# Altium PCB ALLPRINT-CAPBOARD-677512.PcbDoc (part 1 of 3)
Units mm, origin at the board's own origin, x right, y up, seen from the top; angles counter-clockwise.
Board outline 105 x 100 mm, 4 copper layers (Top Layer, Layer 1, Layer 2, Bottom Layer), stack 1.586 mm thick; 295 components, 219 nets, 882 pads, 764 vias.
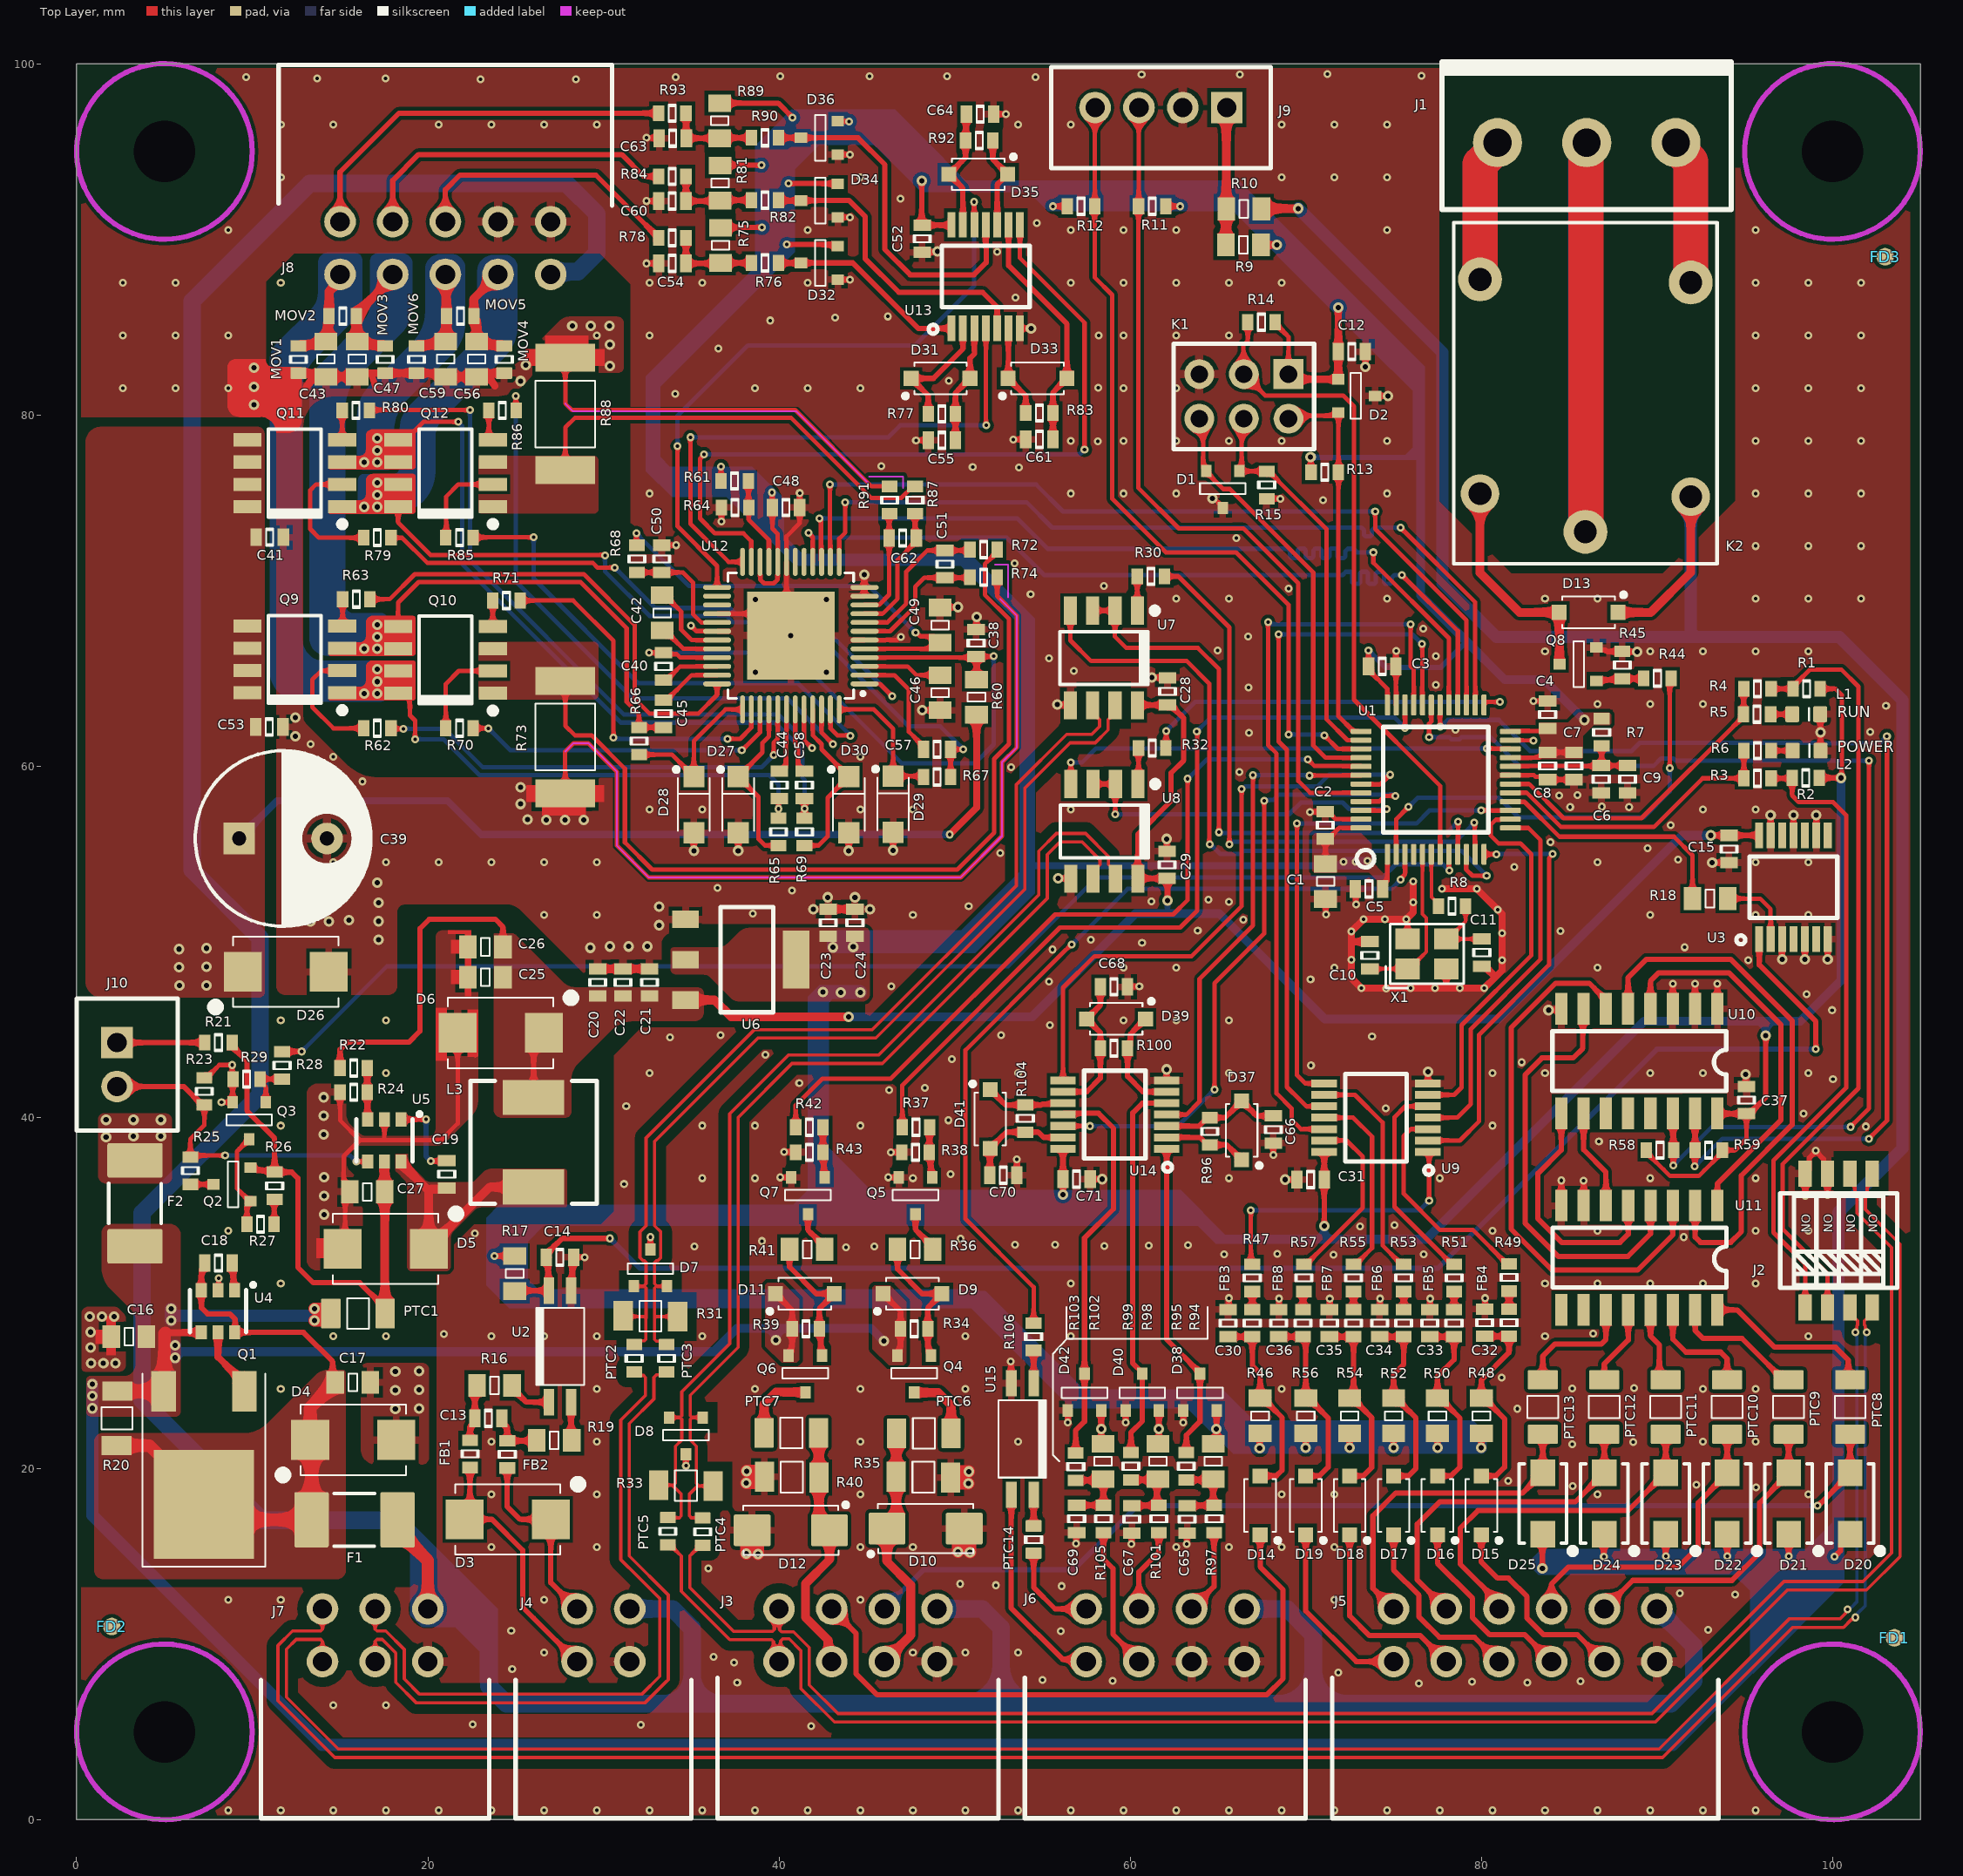
[diagram p0: Top Layer view]
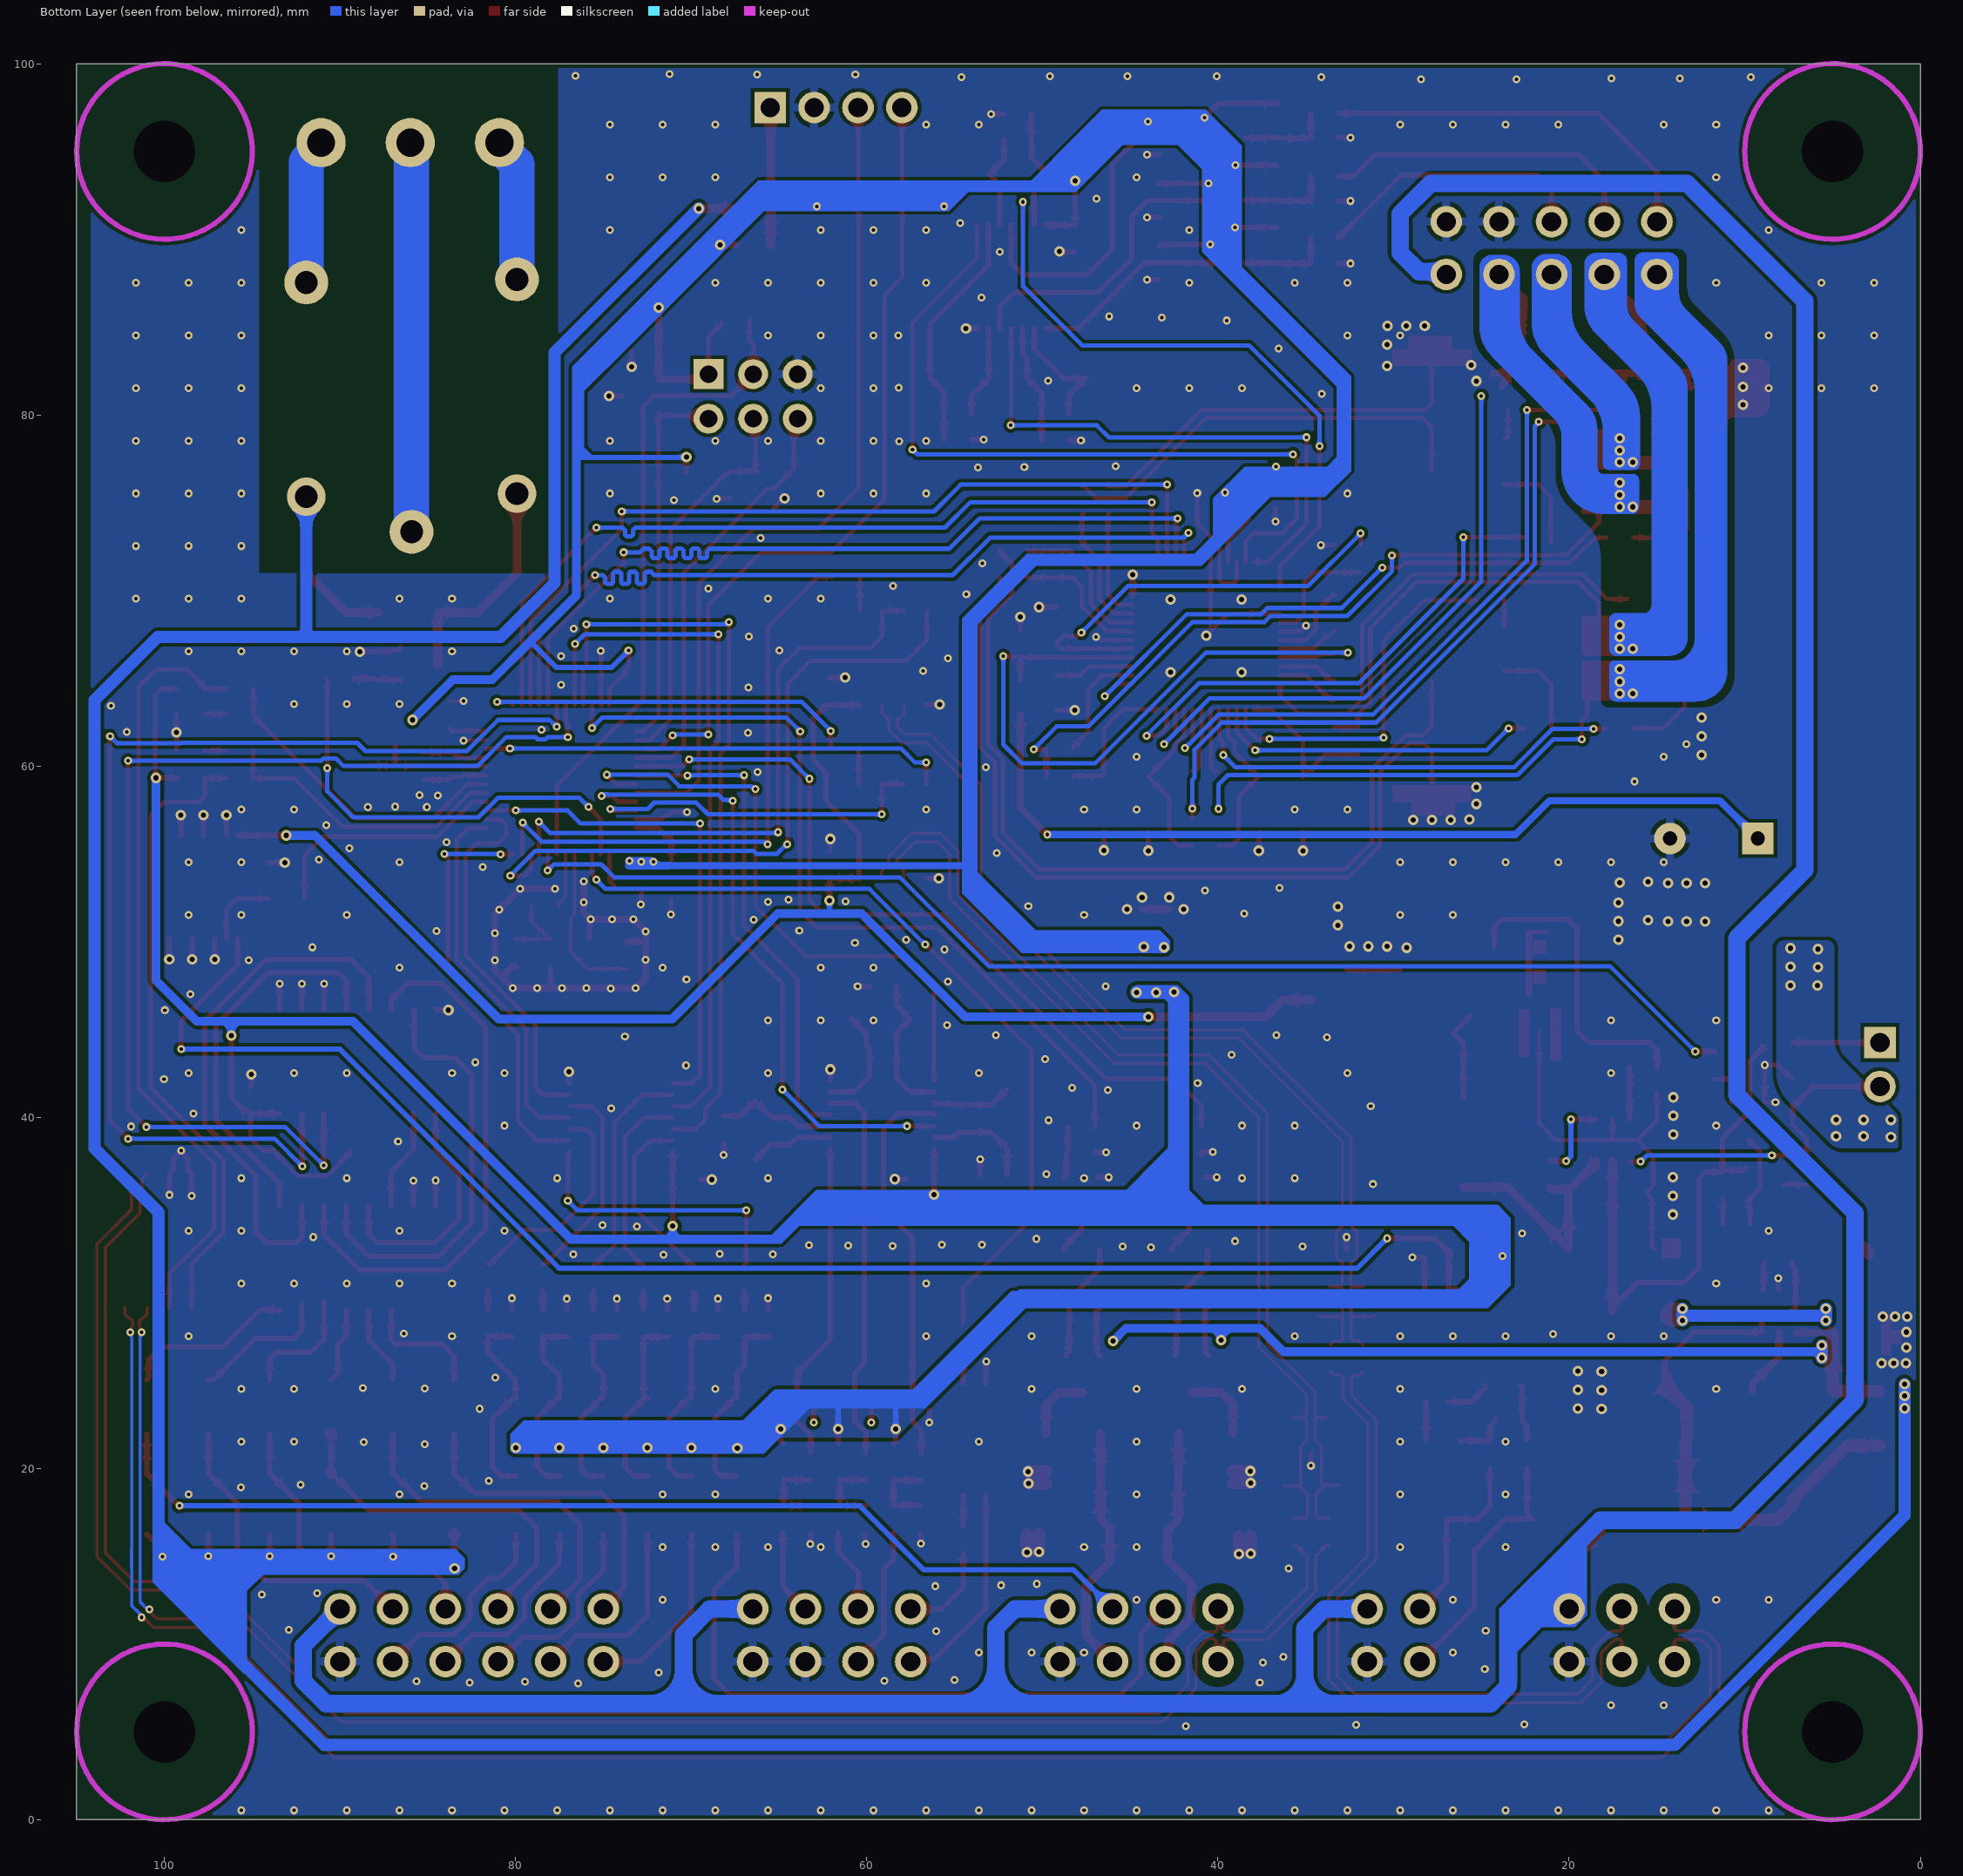
[diagram p1: Bottom Layer view, seen from below]
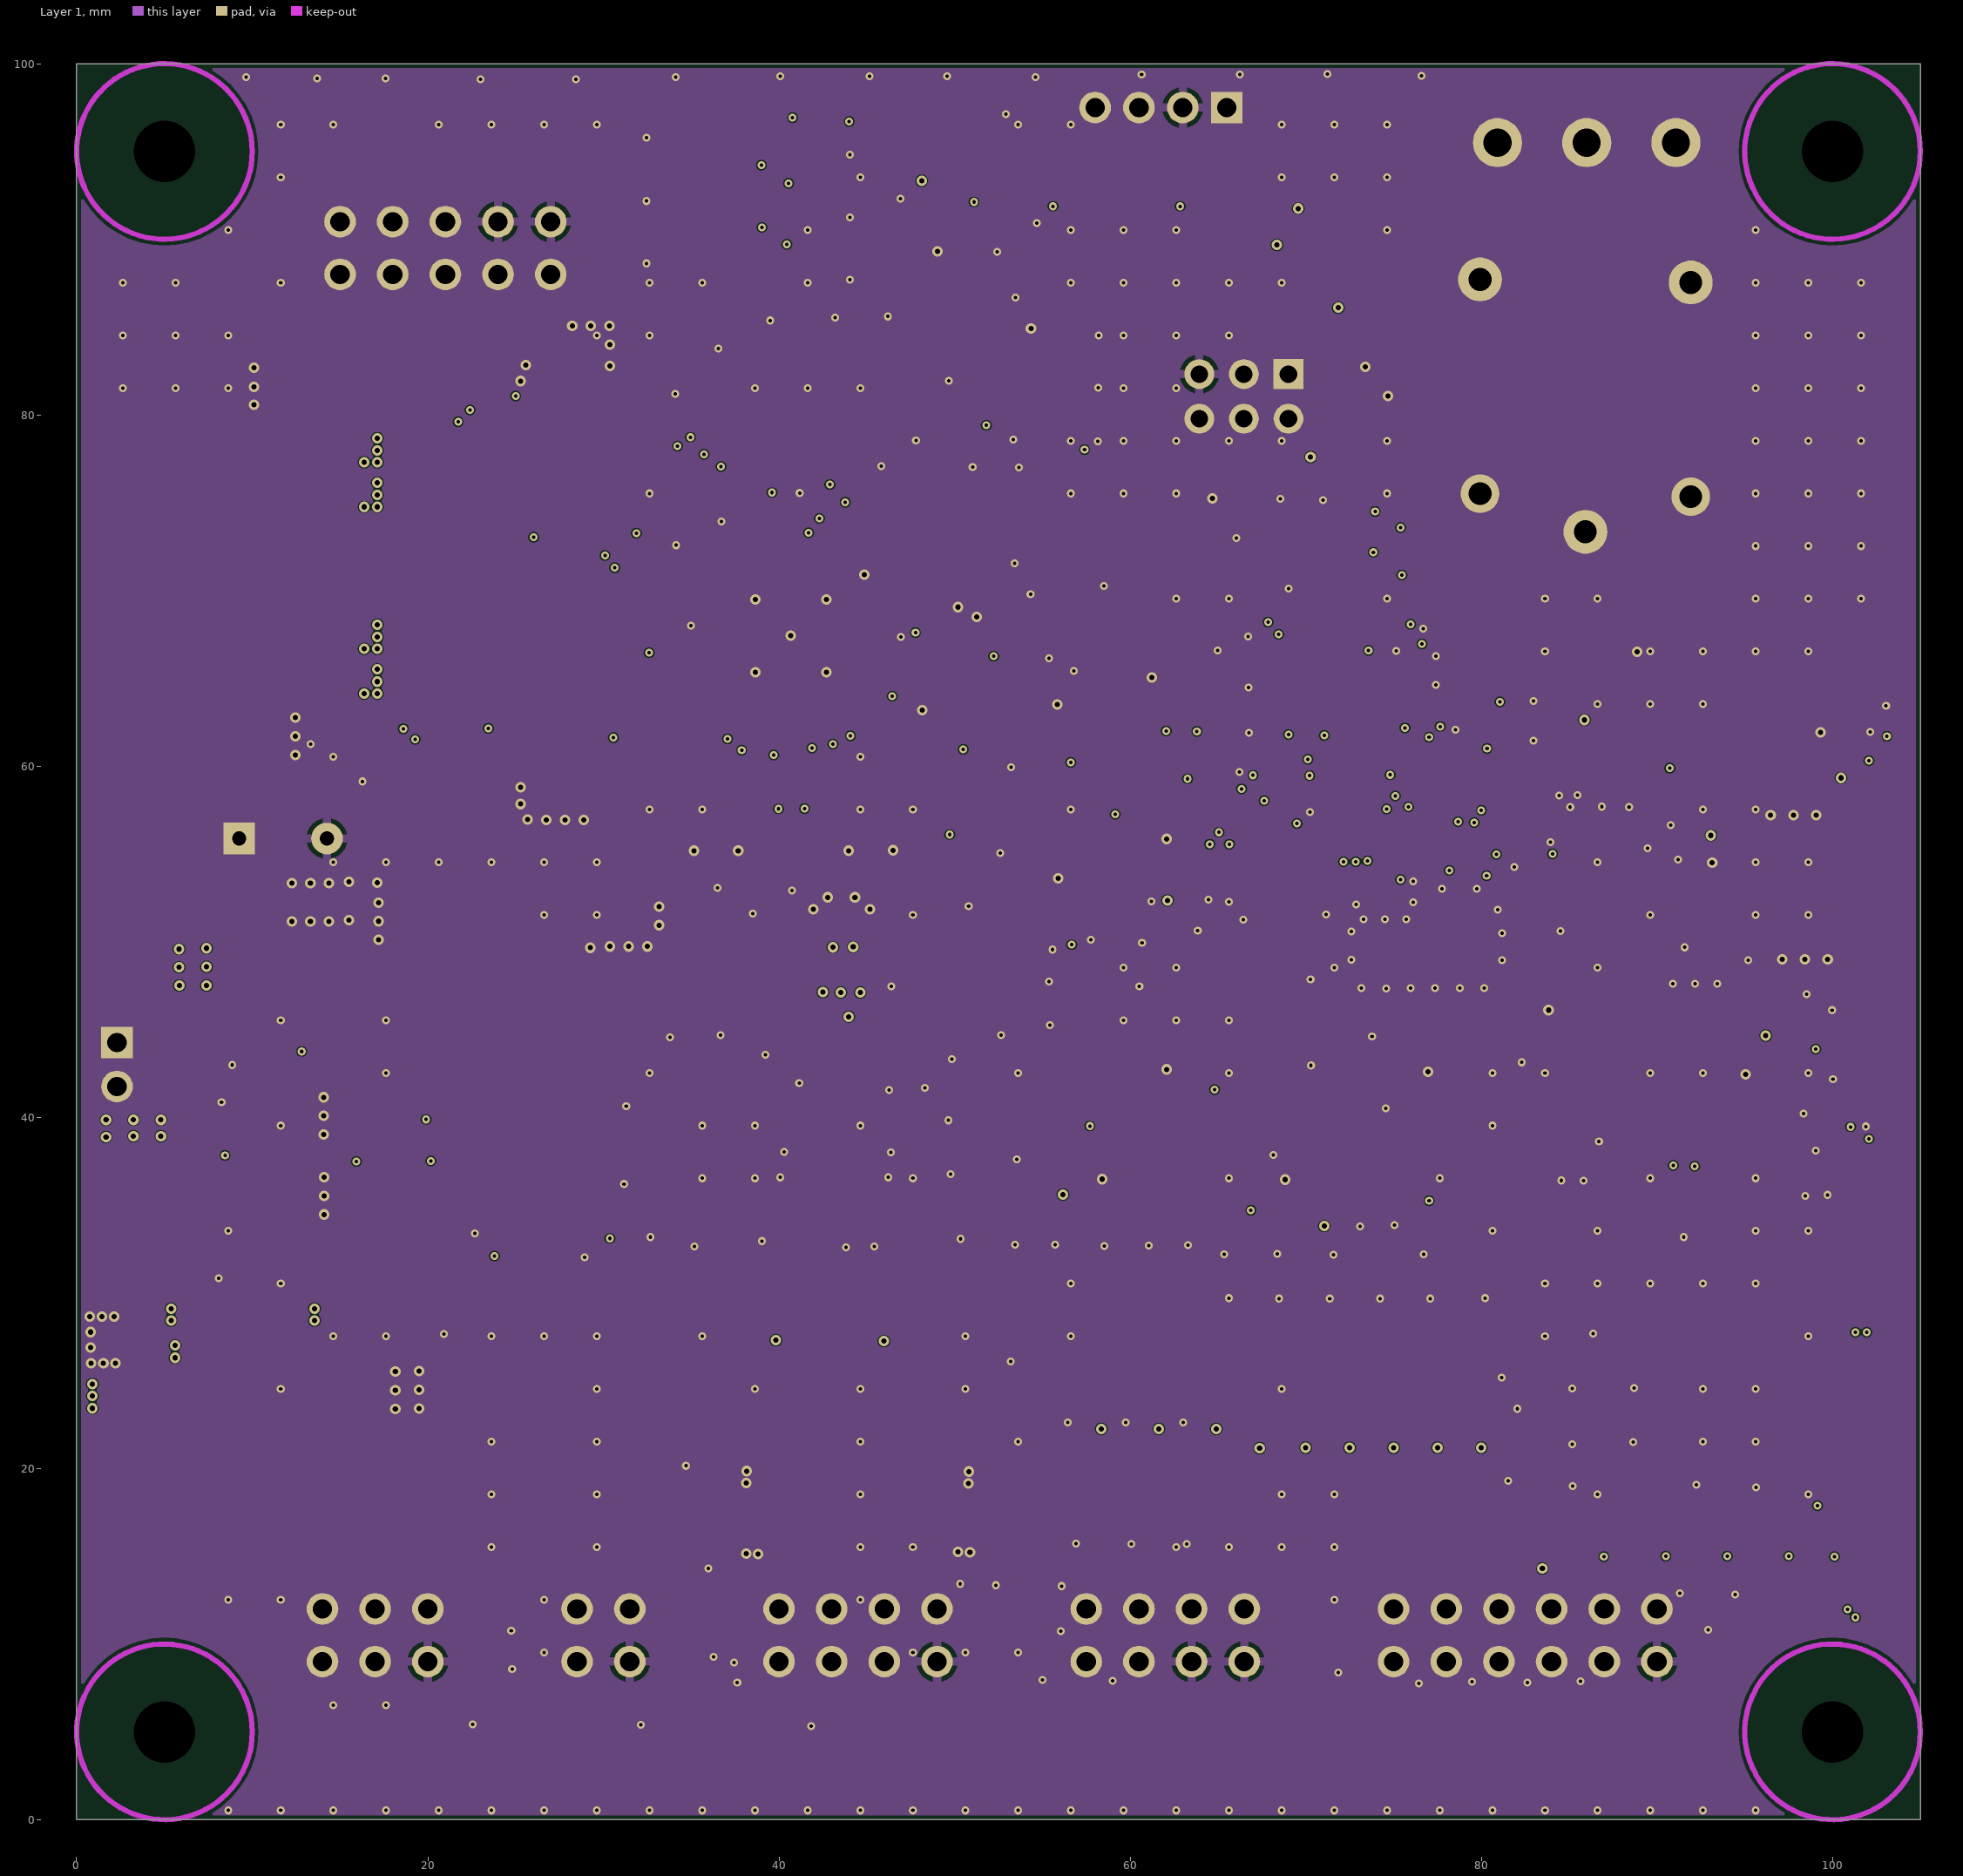
[diagram p2: Layer 1]
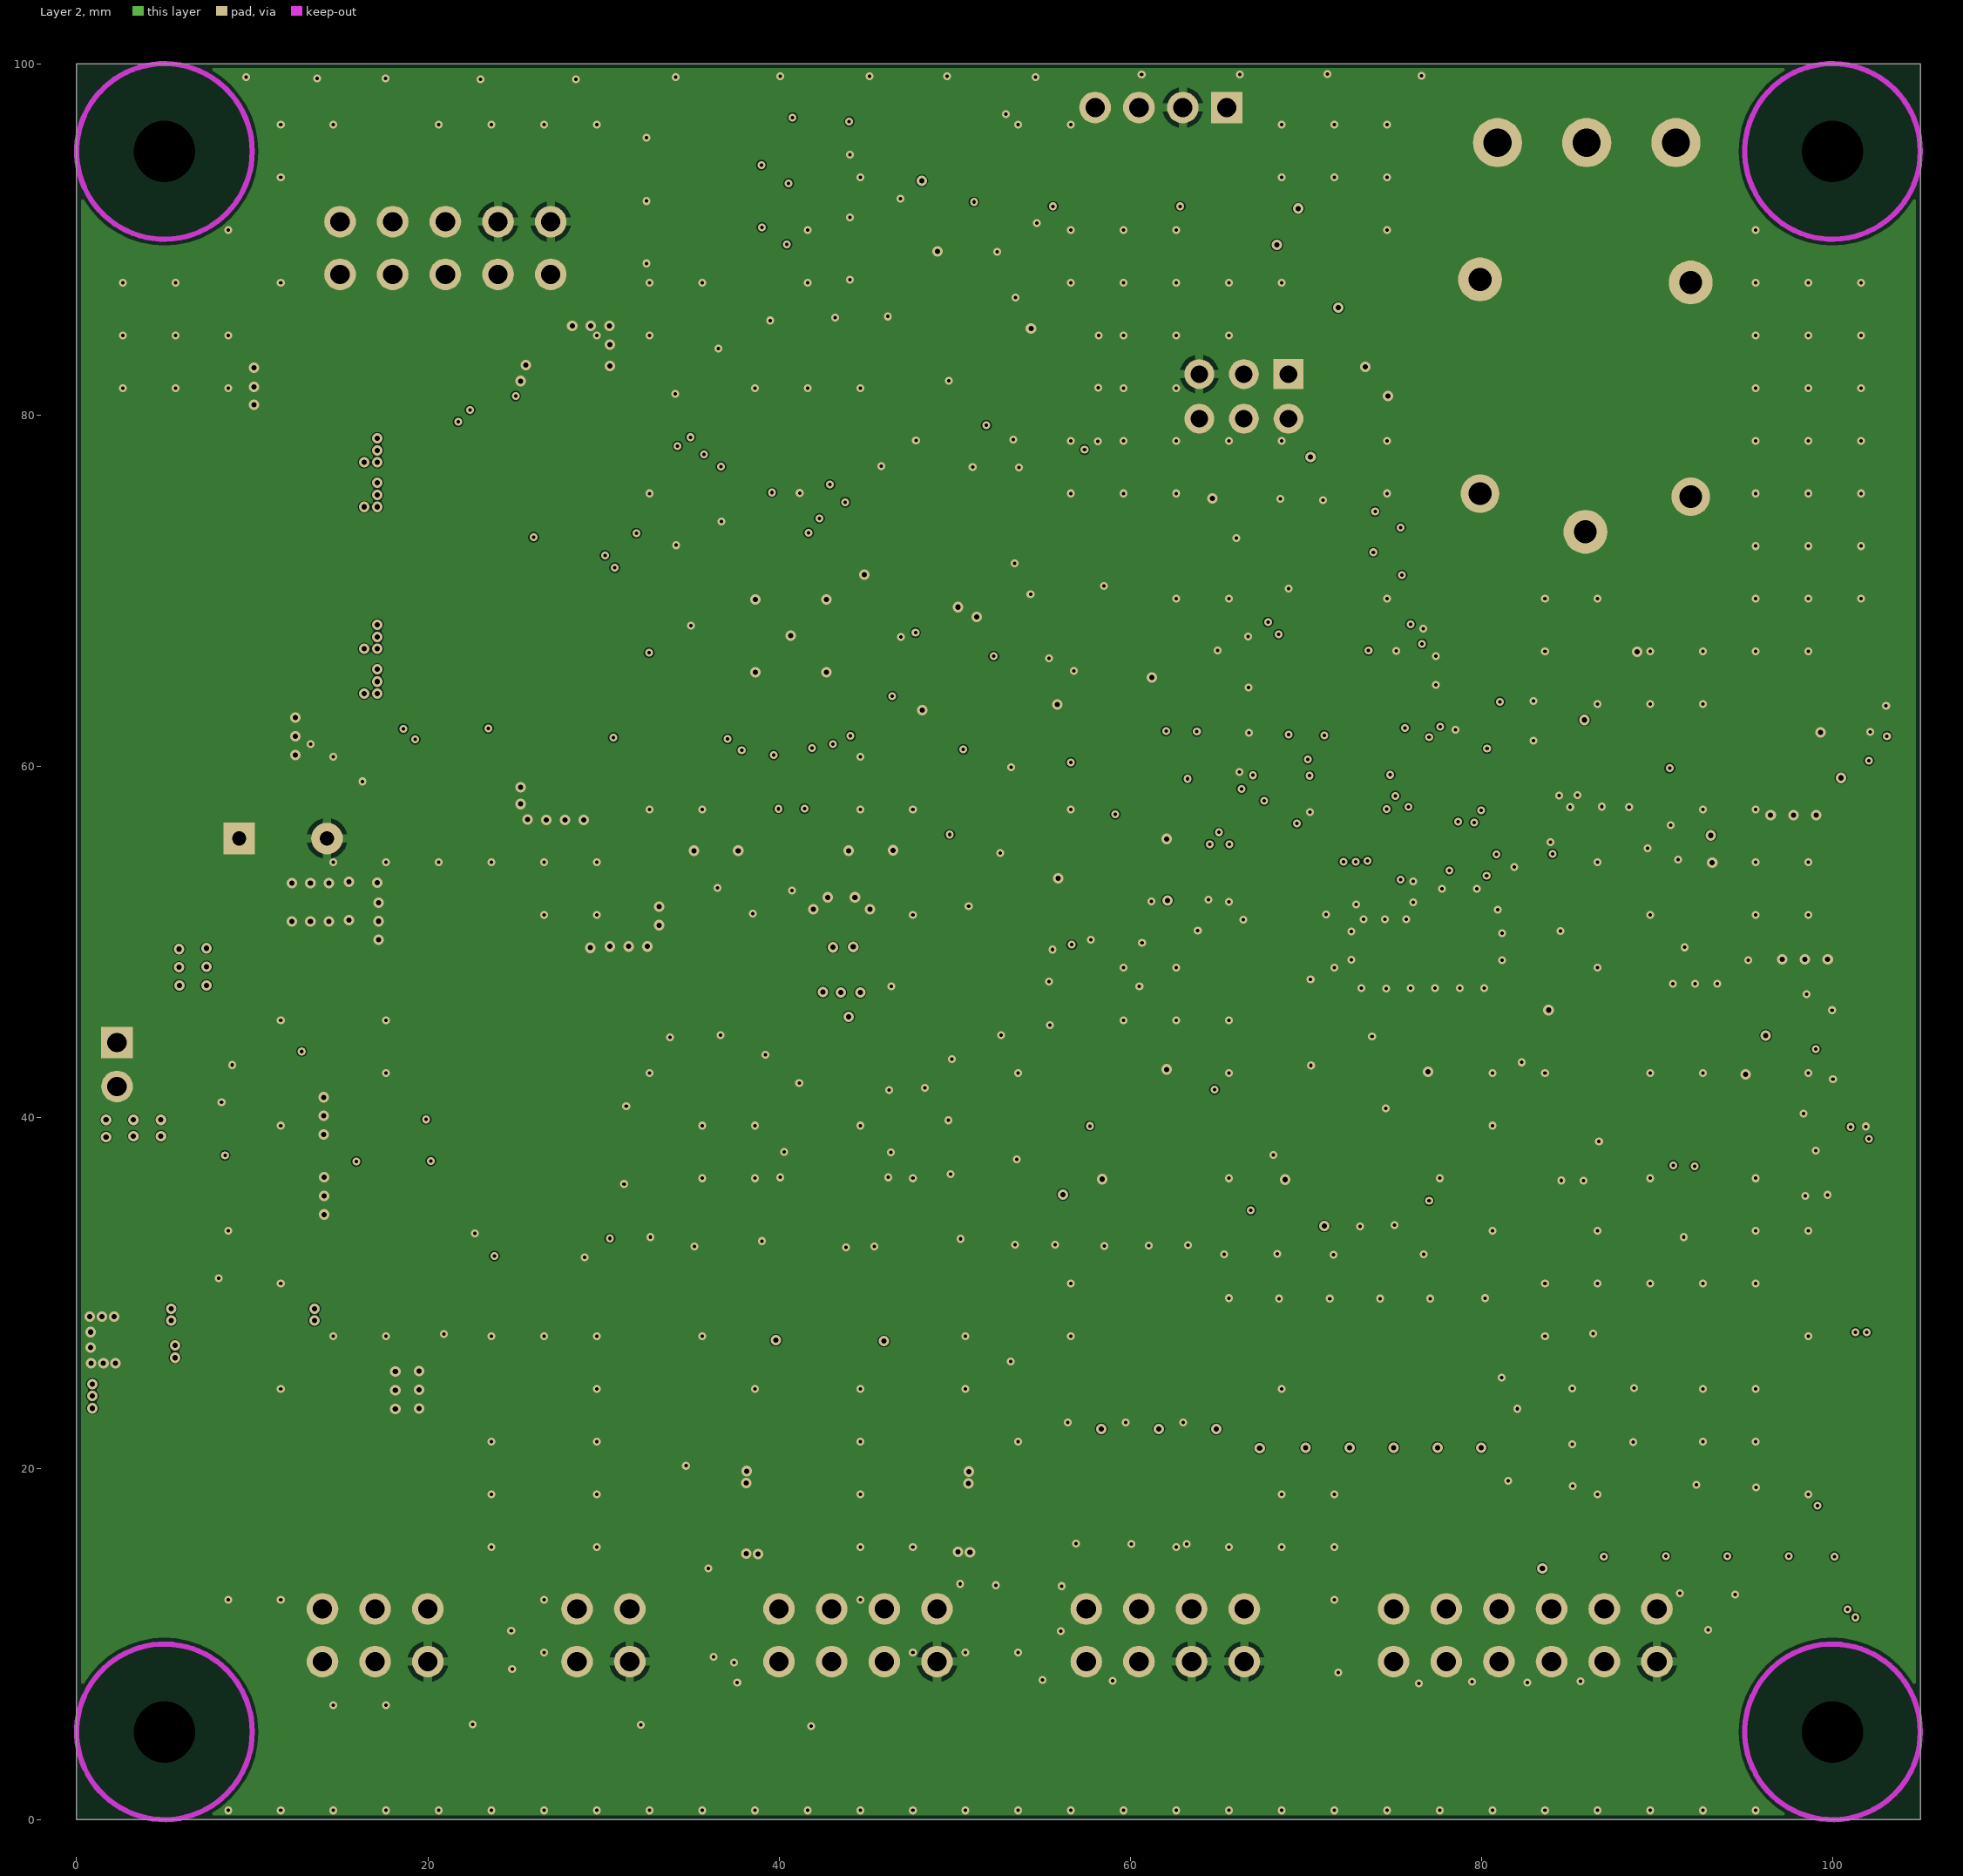
[diagram p3: Layer 2]
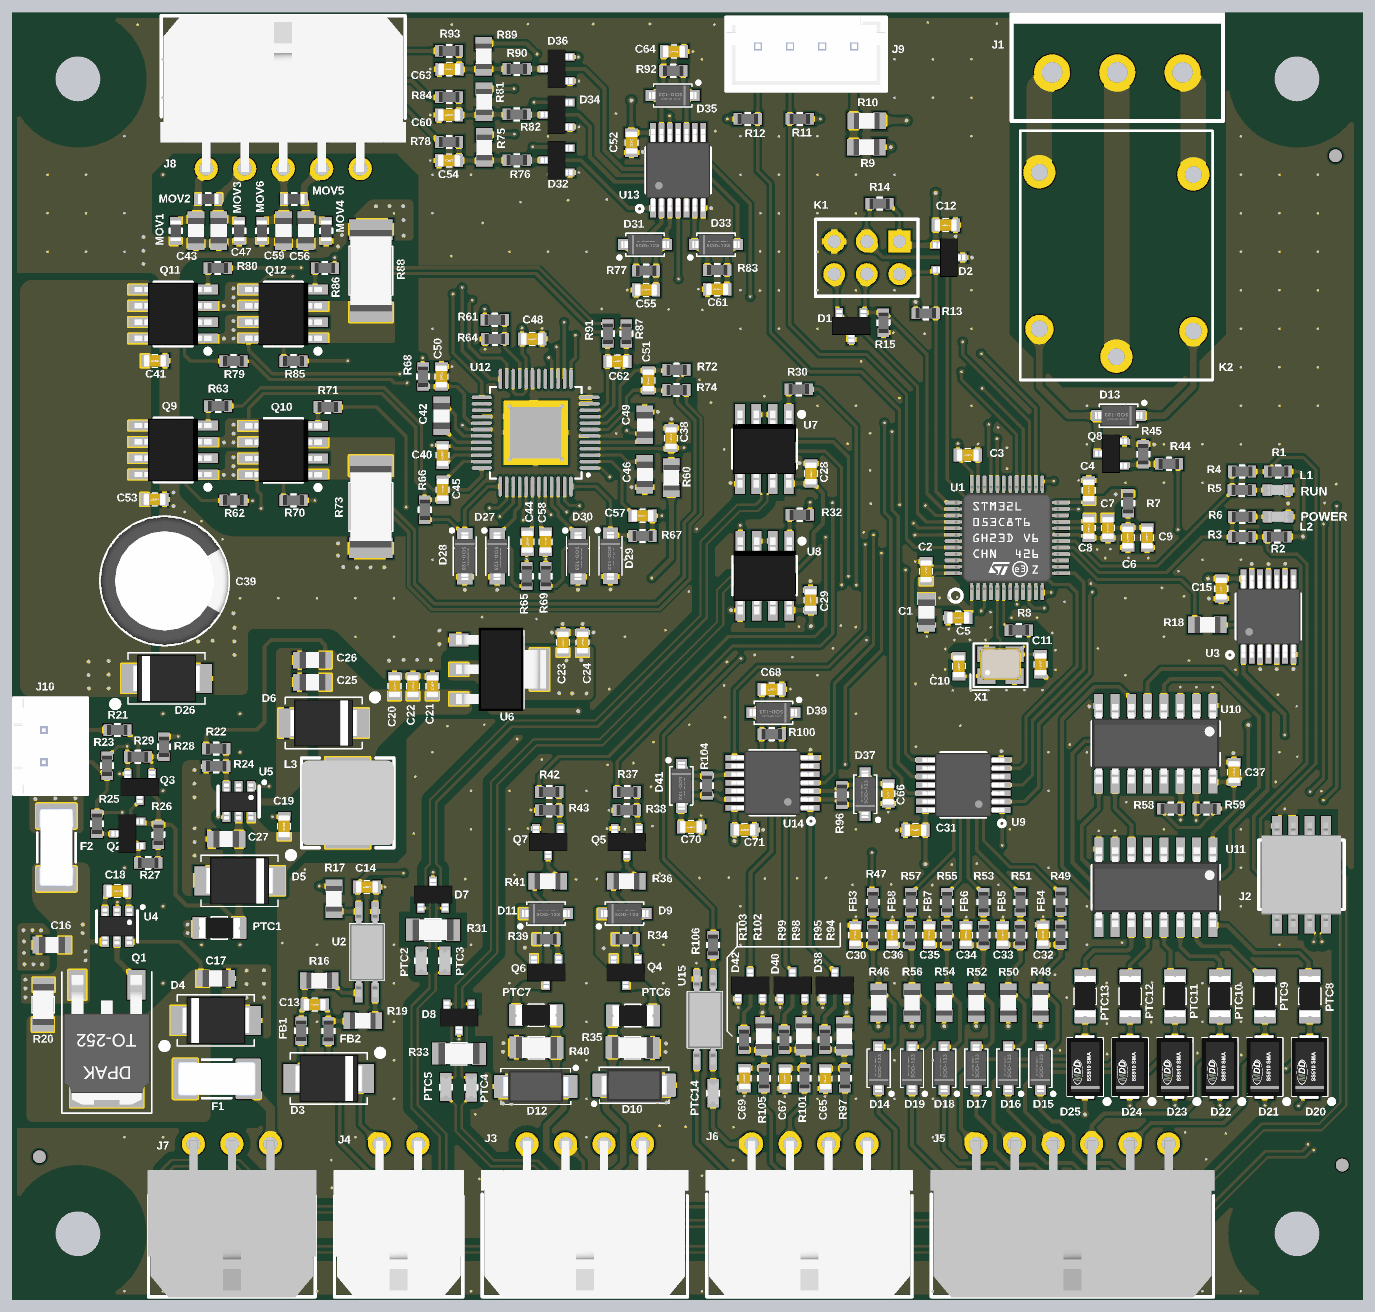
[diagram p6: 3D render of the assembled board from above, using the file's embedded part models]

## Layer stack, top to bottom
Top Solder: solder mask 0.0102, Solder Resist, Dk 3.5
Top Layer: signal copper 0.035
Dielectric 2: prepreg 0.208, PP-022, Dk 4.5
Layer 1: signal copper 0.035
Dielectric 1: dielectric 1.03, FR-4, Dk 4.8
Layer 2: signal copper 0.035
Dielectric 3: prepreg 0.2083, PP-022, Dk 4.5
Bottom Layer: signal copper 0.035
Bottom Solder: solder mask 0.0102, Solder Resist, Dk 3.5

## Board outline
0,0 0,100 105,100 105,0

## Design rules (kind name [scope] priority, off if disabled: settings)
BoardOutlineClearance Conectores [HasFootprint('MCFPL-10') or HasFootprint('STLZ950/3G-5.08-V') or HasFootprint('MCFPL-06') or HasFootprint('MCFPL-04') or HasFootprint('MCFPL-08') or HasFootprint('MCFPL-12') or HasFootprint('PEMC1-02') or HasFootprint('PEMC1-04')] p1: gap=0 ignorepadtopadclearanceinfootprint=FALSE
BoardOutlineClearance [All] p2: gap=0.254 ignorepadtopadclearanceinfootprint=FALSE
Clearance Clearance_DIFF120_to_GND_Poly [InNetClass('DIFF120') vs InNet('GND') and InPolygon and (OnTopLayer or OnBottomLayer)] p1: gap=0.552 ignorepadtopadclearanceinfootprint=TRUE
Clearance [All] p2: gap=0.2 ignorepadtopadclearanceinfootprint=TRUE
DiffPairsRouting [InDifferentialPairClass('DIFF120')] p1: maxlimit=0.4 minlimit=0.127 mostfreqgap=0.4 toplayer_maxgap=0.3 toplayer_prefgap=0.3 toplayer_minwidth=0.095 toplayer_maxwidth=0.184 toplayer_prefwidth=0.184 midlayer1_minwidth=0.024 midlayer1_maxwidth=0.103 midlayer1_prefwidth=0.103 midlayer2_minwidth=0.024 midlayer2_maxwidth=0.103 midlayer2_prefwidth=0.103 bottomlayer_maxgap=0.3 bottomlayer_prefgap=0.3 bottomlayer_minwidth=0.095 bottomlayer_maxwidth=0.184 bottomlayer_prefwidth=0.184 impedanceprofiledriven=TRUE impedanceprofileid={EBEDFD23-E323-47D8-B5DA-5D7CE9809248} impedanceprofilevalue=120.000000 maxuncoupledlength=12.7
HoleSize [All] p1: absolutevalues=TRUE maxlimit=10 minlimit=0.2 maxpercent=80.000 minpercent=20.000
MatchedLengths RS485 [InNetClass('DIFF120')] p1: tolerance=25.4 checknetsindiffpair=TRUE checkdiffpairvsdiffpair=FALSE checkxsignals=FALSE checkothers=FALSE
MatchedLengths SPI [InNetClass('SPI')] p2: tolerance=1 checknetsindiffpair=FALSE checkdiffpairvsdiffpair=TRUE checkxsignals=TRUE checkothers=TRUE
MinimumSolderMaskSliver [All] p1: minsoldermaskwidth=0.1
PolygonConnect GND [All vs InNet('GND')] p1: thpad.connectstyle=Relief thpad.reliefconductorwidth=0.5 thpad.reliefentries=4 thpad.polygonreliefangle="90 Angle" thpad.airgapwidth=0.254 smdpad.connectstyle=Relief smdpad.reliefconductorwidth=0.4 smdpad.reliefentries=4 smdpad.polygonreliefangle="90 Angle" smdpad.airgapwidth=0.2 via.connectstyle=Direct via.reliefconductorwidth=0.254 via.reliefentries=4 via.polygonreliefangle="90 Angle" via.airgapwidth=0.254
PolygonConnect [All] p2: connectstyle=Direct reliefconductorwidth=0.254 reliefentries=4 polygonreliefangle="90 Angle" airgapwidth=0.254
RoutingVias [All] p1: holewidth=0.2 width=0.45 viastyle="Through Hole" minholewidth=0.2 minwidth=0.45 maxholewidth=0.4 maxwidth=0.8
SilkToSilkClearance [All] p1: silktosilkclearance=0.1
SilkToSolderMaskClearance [IsPad] p1: minsilkscreentomaskgap=0.1 clearancetoexposedcopper=TRUE
SolderMaskExpansion Vias [IsVia] p1: expansion=0.102 istentingtop=TRUE
SolderMaskExpansion [All] p2: expansion=0.1 istentingtop=FALSE
Width [All] p1: maxlimit=2 minlimit=0.2 preferedwidth=0.2
25 further rules are at their usual default settings.

## Classes and differential pairs
net class SPI: CLK CS MISO MOSI
differential pair class DIFF120: AUX COM H_RS485 O_RS485 RS485
net class DIFF120: AUX_N AUX_P COM_N COM_P H_RS485_N H_RS485_P O_RS485_N O_RS485_P RS485_N RS485_P
component class STEP_MOTOR: C2 C3 C5 C29 C43 C45 C47 C49 C58 C61 C63 C65 D1 D33 D37 F2 MOV1 MOV2 MOV3 MOV4 MOV5 MOV6 Q9 Q10 Q11 Q12 R4 R63 R65 R67 R69 R78 R84 R86 R88 R90 R93 R95 R98 R99 R102 R104 U8 U12
component class ISO_PGM: PTC14 R7 U15
component class ENCODER_INPUT: C3 C4 C5 C12 C52 C65 D1 D16 D37 R2 R4 R33 R40 R90 R93 R95 R98 R99 R102 R104 U14
component class DIGITAL_OUTPUTS: C58 D24 D33 PTC10 PTC14 R58 R67 U12
component class SIGNAL_OUTPUTS: D16 D19 K2 PTC6 PTC10 Q4 Q5 Q6 Q7 Q8 R5 R36 R38 R40 R47 R49 R51 R58 R69 R78
component class SIGNAL_INPUTS: C32 C34 C43 C45 C47 C49 C58 D16 D19 D24 FB3 FB4 FB5 FB6 FB7 FB8 R47 R49 R51 R54 R56 R58 R63 R65 R69 R78 U12
component class POWER: C17 C19 C21 C32 C34 C43 C47 C49 C58 D5 D7 F1 FD1 FD2 FD3 J2 L2 PTC1 Q1 Q2 Q3 R5 R22 R28 R31 R36 R38 R47 R51 U4 U5 U6
component class MCU: C6 C8 C10 C12 C17 C19 C21 C34 C43 D3 J2 K1 L1 L2 R5 R9 R11 R13 R22 R28 R31 R36 R47 R51 U1 X1
component class INDEX_INPUTS: C19 C21 C34 D3 FB1 FB2 R31 R36 R47 R51 U2 U3
component class RS485_INTERFACE: C29 C43 D7 D16 PTC2 PTC4 PTC5 R31 R33 R40 R47 U7 U8
component class ALLPRINT-CAPBOARD-677512-GENERAL: J1 J2 J5 J7
differential pair O_RS485: +O_RS485_P -O_RS485_N
differential pair RS485: +RS485_P -RS485_N
differential pair H_RS485: +H_RS485_P -H_RS485_N
differential pair COM: +COM_P -COM_N
differential pair AUX: +AUX_P -AUX_N

## Components (designator, comment, footprint, x,y, rotation, side; value= is the part's Value field where it differs from the comment)
C1 "10uF/50V" CAP-0805 71.125,53.425 r90 top
C2 "100nF/50V" CAP-0603 71.1,56.625 r270 top
C3 "100nF/50V" CAP-0603 74.35,65.675 r180 top
C4 "100nF/50V" CAP-0603 83.775,62.925 r270 top
C5 "100nF/50V" CAP-0603 73.6,53 r0 top
C6 "100nF/50V" CAP-0603 86.825,59.25 r90 top
C7 "1uF/25V" CAP-0603 85.275,60 r90 top
C8 "10nF/50V" CAP-0603 83.775,60 r90 top
C9 "1uF/25V" CAP-0603 88.325,59.25 r90 top
C10 "15pF/50V" CAP-0603 73.65,49.225 r270 top
C11 "15pF/50V" CAP-0603 80.025,49.375 r90 top
C12 "100nF/50V" CAP-0603 72.625,83.6 r180 top
C13 "39pF/50V" CAP-0603 23.45,22.85 r180 top
C14 "39pF/50V" CAP-0603 27.525,32.025 r180 top
C15 "100nF/50V" CAP-0603 94.1,55.275 r90 top
C16 "10uF/50V" CAP-0805 2.975,27.5 r0 top
C17 "10uF/50V" CAP-0805 15.725,24.9 r180 top
C18 "100nF/50V" CAP-0603 8.075,31.7 r180 top
C19 "10nF/50V" CAP-0603 21.075,36.75 r90 top
C20 "10uF/16V" CAP-0603 29.675,47.675 r270 top
C21 "10uF/16V" CAP-0603 32.625,47.675 r270 top
C22 "100nF/50V" CAP-0603 31.113,47.675 r270 top
C23 "10uF/16V" CAP-0603 42.8,51.075 r270 top
C24 "100nF/50V" CAP-0603 44.325,51.075 r270 top
C25 "10uF/25V" CAP-0805 23.275,47.975 r0 top
C26 "10uF/25V" CAP-0805 23.275,49.7 r0 top
C27 "10uF/25V" CAP-0805 16.55,35.75 r0 top
C28 "100nF/50V" CAP-0603 62.125,64.25 r270 top
C29 "100nF/50V" CAP-0603 62.1,54.375 r270 top
C30 "39pF/50V" CAP-0603 65.575,28.275 r270 top
C31 "100nF/50V" CAP-0603 70.275,36.45 r0 top
C32 "39pF/50V" CAP-0603 80.195,28.3 r270 top
C33 "39pF/50V" CAP-0603 77.061,28.275 r270 top
C34 "39pF/50V" CAP-0603 74.202,28.275 r270 top
C35 "39pF/50V" CAP-0603 71.343,28.275 r270 top
C36 "39pF/50V" CAP-0603 68.459,28.275 r270 top
C37 "100nF/50V" CAP-0603 95.1,40.975 r270 top
C38 "220nF/50V" CAP-0603 51.225,67 r270 top
C39 "1000uF" CAP-ELET-D10-H20 11.756,55.875 r0 top
C40 "100nF/50V" CAP-0603 33.425,65.675 r90 top
C41 "470nF/50V" CAP-0603 11,73.025 r180 top
C42 "22nF/100V" CAP-0805 33.35,68.725 r270 top
C43 "1nF/100V" CAP-0805 14.2,83.171 r270 top
C44 "220nF/50V" CAP-0603 40.025,58.925 r270 top
C45 "220nF/50V" CAP-0603 33.425,62.975 r270 top
C46 "10uF/50V" CAP-0805 49.175,64.175 r90 top
C47 "1nF/100V" CAP-0805 15.975,83.171 r90 top
C48 "100nF/50V" CAP-0603 40.4,74.725 r180 top
C49 "10uF/50V" CAP-0805 49.175,68.025 r270 top
C50 "470nF/50V" CAP-0603 33.325,71.8 r270 top
C51 "2.2nF/50V" CAP-0603 49.45,71.5 r90 top
C52 "100nF/50V" CAP-0603 48.15,90.025 r90 top
C53 "470nF/50V" CAP-0603 10.975,62.225 r180 top
C54 "39pF/50V" CAP-0603 33.925,88.625 r0 top
C55 "10nF/50V" CAP-0603 49.275,78.55 r0 top
C56 "1nF/100V" CAP-0805 22.775,83.171 r270 top
C57 "220nF/50V" CAP-0603 49,60.95 r0 top
C58 "220nF/50V" CAP-0603 41.45,58.925 r270 top
C59 "1nF/100V" CAP-0805 21.021,83.171 r90 top
C60 "39pF/50V" CAP-0603 33.925,92.175 r0 top
C61 "10nF/50V" CAP-0603 54.825,78.6 r0 top
C62 "2.2nF/50V" CAP-0603 47.046,72.975 r0 top
C63 "39pF/50V" CAP-0603 33.95,95.75 r0 top
C64 "10nF/50V" CAP-0603 51.45,97.125 r180 top
C65 "39pF/50V" CAP-0603 63.25,17.1 r90 top
C66 "10nF/50V" CAP-0603 68.15,39.3 r90 top
C67 "39pF/50V" CAP-0603 60.1,17.1 r90 top
C68 "10nF/50V" CAP-0603 59.075,47.425 r180 top
C69 "39pF/50V" CAP-0603 56.95,17.125 r90 top
C70 "10nF/50V" CAP-0603 52.775,36.7 r180 top
C71 "100nF/50V" CAP-0603 56.95,36.475 r180 top
D1 "SM712.TCT-ES" SOT23-3 65.275,75.75 r180 top
D2 "SM712.TCT-ES" SOT23-3 72.9,81.075 r270 top
D3 "SMBJ15CA" DO214-AA 24.55,17.1 r0 top
D4 "SMBJ26CA" DO214-AA 15.75,21.625 r180 top
D5 "MBRS360BT3G" DO214-AA 17.6,32.5 r0 top
D6 "SMBJ5.0A" DO214-AA 24.15,44.8 r0 top
D7 "SM712.TCT-ES" SOT23-3 32.675,31.425 r0 top
D8 "SM712.TCT-ES" SOT23-3 34.7,21.85 r180 top
D9 "BZT52C15" SOD123 47.6,29.95 r180 top
D10 "SMAJ26A" "DO214-AC (SMA)" 48.35,16.575 r180 top
D11 "BZT52C15" SOD123 41.475,29.95 r180 top
D12 "SMAJ26A" "DO214-AC (SMA)" 40.675,16.475 r0 top
D13 "1N4148" SOD123 86.1,68.75 r0 top
D14 "1N5819HW-7-F" SOD123 67.4,17.9 r270 top
D15 "1N5819HW-7-F" SOD123 80,17.9 r270 top
D16 "1N5819HW-7-F" SOD123 77.5,17.9 r270 top
D17 "1N5819HW-7-F" SOD123 75,17.9 r270 top
D18 "1N5819HW-7-F" SOD123 72.5,17.9 r270 top
D19 "1N5819HW-7-F" SOD123 70,17.9 r270 top
D20 "1N4007-M7" SMA 101,18 r270 top
D21 "1N4007-M7" SMA 97.5,18 r270 top
D22 "1N4007-M7" SMA 94,18 r270 top
D23 "1N4007-M7" SMA 90.5,18 r270 top
D24 "1N4007-M7" SMA 87,18 r270 top
D25 "1N4007-M7" SMA 83.5,18 r270 top
D26 "SMBJ26CA" DO214-AA 11.906,48.275 r180 top
D27 "MBRS360BT3G" SOD-123FL 37.675,57.8 r90 top
D28 "MBRS360BT3G" SOD-123FL 35.15,57.8 r90 top
D29 "MBRS360BT3G" SOD-123FL 46.5,57.825 r90 top
D30 "MBRS360BT3G" SOD-123FL 43.975,57.8 r90 top
D31 "1N4148" SOD123 49.2,82.075 r180 top
D32 "BAT54S" SOT23-3 42.3,88.65 r90 top
D33 "1N4148" SOD123 54.725,82.075 r180 top
D34 "BAT54S" SOT23-3 42.3,92.2 r90 top
D35 "1N4148" SOD123 51.35,93.7 r0 top
D36 "BAT54S" SOT23-3 42.3,95.775 r90 top
D37 "1N4148" SOD123 66.35,39.25 r270 top
D38 "BAT54S" SOT23-3 63.975,24.35 r0 top
D39 "1N4148" SOD123 59.2,45.6 r0 top
D40 "BAT54S" SOT23-3 60.687,24.35 r0 top
D41 "1N4148" SOD123 52.025,39.9 r90 top
D42 "BAT54S" SOT23-3 57.4,24.35 r0 top
F1 "JFC2410-2100FS" FUSE-2410 15.825,17.075 r180 top
F2 "JFC2410-1500TS" FUSE-2410 3.325,35.1 r270 top
FB1 "BLM18PG121SN1D" RES-0603 22.4,20.825 r90 top
FB2 "BLM18PG121SN1D" RES-0603 24.525,20.8 r90 top
FB3 "BLM18PG121SN1D" RES-0603 66.955,28.275 r90 top
FB4 "BLM18PG121SN1D" RES-0603 81.575,28.3 r90 top
FB5 "BLM18PG121SN1D" RES-0603 78.441,28.275 r90 top
FB6 "BLM18PG121SN1D" RES-0603 75.582,28.275 r90 top
FB7 "BLM18PG121SN1D" RES-0603 72.723,28.275 r90 top
FB8 "BLM18PG121SN1D" RES-0603 69.839,28.275 r90 top
FD1 "FIDUCIAL" FIDUCIAL 103.525,10.35 r90 top
FD2 "FIDUCIAL" FIDUCIAL 2,11 r90 top
FD3 "FIDUCIAL" FIDUCIAL 103,89 r90 top
J1 "STLZ950/3G-5.08-V-GREEN_1" STLZ950/3G-5.08-V 86,95.5 r180 top locked
J2 "DSHP04TS-S" SW-SMD_8P-L6.7-W5.4-P1.27-LS8.5 100.35,32.975 r0 top
J3 "MCFPL-08" MCFPL-08 44.5,10.5 r0 top locked
J4 "MCFPL-04" MCFPL-04 30,10.5 r0 top locked
J5 "MCFPL-12" MCFPL-12 82.5,10.5 r0 top locked
J6 "MCFPL-08" MCFPL-08 62,10.5 r0 top locked
J7 "MCFPL-06" MCFPL-06 17,10.5 r0 top locked
J8 "MCFPL-10" MCFPL-10 21,89.5 r180 top locked
J9 "PEMC1-04" PEMC1-04 61.75,97.5 r180 top locked
J10 "PEMC1-02" PEMC1-02 2.3,43 r270 top locked
K1 "BPDC-06" BPDC-06 66.475,81.05 r270 top
K2 "AX1RC2" METALTEX-AX1 85.925,80.525 r180 top
L1 "YLED0603R" LED-SMD-0603 98.5,62.95 r180 top
L2 "YLED0603R" LED-SMD-0603 98.525,60.875 r180 top
L3 "22uH" INDUTOR-6672 26.025,38.575 r90 top
MOV1 "RL0603A360K" MOV-0603 12.625,83.15 r270 top
MOV2 "RL0603A360K" MOV-0603 15.15,85.625 r180 top
MOV3 "RL0603A360K" MOV-0603 17.575,83.15 r90 top
MOV4 "RL0603A360K" MOV-0603 24.35,83.15 r270 top
MOV5 "RL0603A360K" MOV-0603 21.85,85.625 r0 top
MOV6 "RL0603A360K" MOV-0603 19.35,83.15 r90 top
PTC1 "JK-nSMD050-30" PTC-1206 16.025,28.825 r0 top
PTC2 "BSMD0603-001-60V" PTC-0603 31.75,26.275 r270 top
PTC3 "BSMD0603-001-60V" PTC-0603 33.6,26.275 r90 top
PTC4 "BSMD0603-001-60V" PTC-0603 35.65,16.4 r270 top
PTC5 "BSMD0603-001-60V" PTC-0603 33.675,16.425 r90 top
PTC6 "JK-nSMD050-30" PTC-1206 48.25,22 r180 top
PTC7 "JK-nSMD050-30" PTC-1206 40.7,22.025 r0 top
PTC8 "JK-nSMD050-30" PTC-1206 101,23.5 r270 top
PTC9 "JK-nSMD050-30" PTC-1206 97.5,23.5 r270 top
PTC10 "JK-nSMD050-30" PTC-1206 94,23.5 r270 top
PTC11 "JK-nSMD050-30" PTC-1206 90.5,23.5 r270 top
PTC12 "JK-nSMD050-30" PTC-1206 87,23.5 r270 top
PTC13 "JK-nSMD050-30" PTC-1206 83.5,23.5 r270 top
PTC14 "BSMD0603-001-60V" PTC-0603 54.5,15.95 r270 top
Q1 "SP40N02HTH" TO-252-2 7.25,24.4 r180 top
Q2 "BC856" SOT23-3 8.85,36.175 r90 top
Q3 "BC846" SOT23-3 9.825,39.8 r180 top
Q4 "SI2319" SOT23-3 47.7,25.375 r180 top
Q5 "BC846" SOT23-3 47.775,35.525 r180 top
Q6 "SI2319" SOT23-3 41.5,25.375 r180 top
Q7 "BC846" SOT23-3 41.65,35.525 r180 top
Q8 "BC846" SOT23-3 85.5,65.8 r90 top
Q9 "AO4882" SOIC-08 12.425,66.075 r180 top
Q10 "AO4882" SOIC-08 21.006,66.05 r180 top
Q11 "AO4882" SOIC-08 12.425,76.675 r180 top
Q12 "AO4882" SOIC-08 21.006,76.675 r180 top
R1 "10K" RES-0603 98.525,64.4 r0 top
R2 "10K" RES-0603 98.475,59.325 r0 top
R3 "1K" RES-0603 95.725,59.3 r0 top
R4 "1K" RES-0603 95.725,64.4 r0 top
R5 "1K" RES-0603 95.7,62.95 r0 top
R6 "1K" RES-0603 95.725,60.875 r180 top
R7 "10R" RES-0603 86.85,61.925 r270 top
R8 "0R" RES-0603 78.325,52.025 r180 top
R9 "0R" RES-0805 66.45,89.675 r0 top
R10 "0R" RES-0805 66.475,91.725 r0 top
R11 "1K" RES-0603 61.25,91.875 r0 top
R12 "1K" RES-0603 57.2,91.875 r180 top
R13 "10K" RES-0603 71.075,76.725 r180 top
R14 "10K" RES-0603 67.475,85.275 r0 top
R15 "10K" RES-0603 67.775,76 r90 top
R16 "2.2K" RES-0805 23.8,24.725 r180 top
R17 "1K" RES-0805 24.95,31.1 r90 top
R18 "1K" RES-0805 93.025,52.45 r180 top
R19 "2.2K" RES-0805 27.2,21.6 r0 top
R20 "0R" RES-1206 2.3,22.85 r90 top
R21 "10K" RES-0603 8.075,44.25 r180 top
R22 "49.9K" RES-0603 15.775,42.8 r180 top
R23 "100K" RES-0603 7.275,41.475 r270 top
R24 "9.53K" RES-0603 15.775,41.425 r0 top
R25 "10K" RES-0603 6.475,36.95 r270 top
R26 "10K" RES-0603 11.275,36.1 r90 top
R27 "10K" RES-0603 10.475,33.9 r0 top
R28 "10K" RES-0603 11.7,42.95 r270 top
R29 "10K" RES-0603 9.675,42.175 r180 top
R30 "100R" RES-0603 61.175,70.8 r180 top
R31 "120R" RES-1206 32.675,28.675 r180 top
R32 "100R" RES-0603 61.25,61.025 r180 top
R33 "120R" RES-1206 34.7,19.025 r0 top
R34 "100K" RES-0603 47.7,27.95 r180 top
R35 "2K" RES-1206 48.225,19.5 r180 top
R36 "2.2K" RES-0805 47.75,32.475 r0 top
R37 "10K" RES-0603 47.8,39.425 r180 top
R38 "10K" RES-0603 47.775,38 r0 top
R39 "100K" RES-0603 41.525,27.95 r180 top
R40 "2K" RES-1206 40.725,19.5 r0 top
R41 "2.2K" RES-0805 41.6,32.475 r0 top
R42 "10K" RES-0603 41.725,39.425 r180 top
R43 "10K" RES-0603 41.725,38 r0 top
R44 "10K" RES-0603 90.025,65 r180 top
R45 "10K" RES-0603 88.025,65.75 r90 top
R46 "2.2K" RES-0805 67.4,23 r90 top
R47 "10K" RES-0603 66.955,30.85 r90 top
R48 "2.2K" RES-0805 80,23 r90 top
R49 "10K" RES-0603 81.575,30.875 r90 top
R50 "2.2K" RES-0805 77.5,23 r90 top
R51 "10K" RES-0603 78.45,30.85 r90 top
R52 "2.2K" RES-0805 75,23 r90 top
R53 "10K" RES-0603 75.575,30.85 r90 top
R54 "2.2K" RES-0805 72.5,23 r90 top
R55 "10K" RES-0603 72.725,30.85 r90 top
R56 "2.2K" RES-0805 70,23 r90 top
R57 "10K" RES-0603 69.9,30.85 r90 top
R58 "1K" RES-0603 90.175,38.125 r180 top
R59 "1K" RES-0603 92.95,38.125 r0 top
R60 "4.7R" RES-0805 51.25,63.925 r270 top
R61 "0R" RES-0603 37.475,76.225 r180 top
R62 "10R" RES-0603 17.125,62.15 r180 top
R63 "10R" RES-0603 15.925,69.5 r0 top
R64 "0R" RES-0603 37.5,74.725 r0 top
R65 "1R" RES-0603 39.975,56.25 r90 top
R66 "1R" RES-0603 32.025,61.425 r90 top
R67 "1R" RES-0603 49,59.375 r0 top
R68 "2.2R" RES-0603 31.9,71.8 r270 top
R69 "1R" RES-0603 41.45,56.25 r90 top
R70 "10R" RES-0603 21.8,62.15 r180 top
R71 "10R" RES-0603 24.475,69.425 r0 top
R72 "47R" RES-0603 51.65,72.325 r0 top
R73 "75mΩ" RES-2512 27.825,61.65 r90 top
R74 "47R" RES-0603 51.65,70.75 r0 top
R75 "10K" RES-0805 36.675,89.65 r90 top
R76 "1K" RES-0603 39.2,88.65 r0 top
R77 "100R" RES-0603 49.275,80.05 r0 top
R78 "10R" RES-0603 33.925,90.075 r0 top
R79 "10R" RES-0603 17.125,73 r180 top
R80 "10R" RES-0603 15.9,80.25 r0 top
R81 "10K" RES-0805 36.65,93.2 r90 top
R82 "1K" RES-0603 39.2,92.225 r0 top
R83 "100R" RES-0603 54.825,80.1 r0 top
R84 "10R" RES-0603 33.925,93.575 r0 top
R85 "10R" RES-0603 21.8,73 r180 top
R86 "10R" RES-0603 24.25,80.25 r0 top
R87 "47R" RES-0603 47.746,75.15 r90 top
R88 "75mΩ" RES-2512 27.831,80.05 r270 top
R89 "10K" RES-0805 36.625,96.75 r90 top
R90 "1K" RES-0603 39.2,95.775 r0 top
R91 "47R" RES-0603 46.296,75.15 r90 top
R92 "100R" RES-0603 51.4,95.625 r180 top
R93 "10R" RES-0603 33.925,97.175 r0 top
R94 "10K" RES-0805 64.725,20.4 r90 top
R95 "1K" RES-0603 63.2,20.125 r90 top
R96 "100R" RES-0603 64.525,39.2 r90 top
R97 "10R" RES-0603 64.775,17.125 r90 top
R98 "10K" RES-0805 61.575,20.4 r90 top
R99 "1K" RES-0603 60.05,20.125 r90 top
R100 "100R" RES-0603 59.075,43.925 r180 top
R101 "10R" RES-0603 61.625,17.125 r90 top
R102 "10K" RES-0805 58.45,20.4 r90 top
R103 "1K" RES-0603 56.9,20.1 r90 top
R104 "100R" RES-0603 54.025,39.925 r270 top
R105 "10R" RES-0603 58.475,17.125 r90 top
R106 "1K" RES-0603 54.5,27.5 r270 top
U1 "STM32G431CBT6" LQFP-48 77.15,59.725 r0 top
U2 "EL3H7(C)(TA)-G" SSOP-4 27.525,26.95 r90 top
U3 "SN74HC04PWR" TSSOP-14 97.775,53.1 r90 top
U4 "LM74700QDBVRQ1" SOT23-6 8.05,28.95 r270 top
U5 "AOZ1282CI" SOT23-6 17.525,38.675 r270 top
U6 "LM1117S-3.3" SOT223 34.675,48.975 r270 top
U7 "MAX485ESA" SOIC-08 58.5,66.15 r270 top
U8 "MAX485ESA" SOIC-08 58.525,56.275 r270 top
U9 "SN74HC04PWR" TSSOP-14 74,39.975 r180 top
U10 "PCF8574M/TR" SOIC-16-3D 88.995,43.197 r180 top
U11 "ULN2003ADR" SOIC-16-3D 89,32 r180 top
U12 "TMC5160A-TA-T" TQFP-48_L7.0-W7.0-P0.50-LS9.0-BL-EP 40.675,67.425 r90 top
U13 "SN74HC04PWR" TSSOP-14 51.775,87.875 r90 top
U14 "SN74HC04PWR" TSSOP-14 59.125,40.15 r180 top
U15 "EL3H7(C)(TA)-G" SSOP-4 53.865,21.675 r270 top
X1 "CF4008M00012001" TAXM8M4RDBCCT2T 76.9,49.3 r0 top

## Footprints (in the part's own frame and the unit in brackets; to place one, negate y for a bottom-side part, rotate by r counter-clockwise, add the part's x,y. Pads: shape width x height; smd on the part's side, far side on the other; paste and mask are expansions set on the pad)
BPDC-06 [mm] "BARRA DE PINOS DUPLA 6 VIAS"
  rect 1.7x1.7 hole 1: 1(-1.27,2.54)
  round 1.7 hole 1: 2(1.27,2.54) 3(-1.27,0) 4(1.27,0) 5(-1.27,-2.54) 6(1.27,-2.54)
  silkscreen extent -3,-4 3,4
CAP-0603 [mm]
  rect 0.65x1 smd: 1(-0.775,0) 2(0.775,0)
  silkscreen extent -0.2,-0.5 0.2,0.5, body extent -0.88,-0.48 0.88,0.48, height 0.94
CAP-0805 [mm]
  rect 1x1.3 smd: 1(-1,0) 2(1,0)
  silkscreen extent -0.25,-0.5 0.25,0.5, body extent -1,-0.66 1,0.66, height 0.73
CAP-ELET-D10-H20 [mm]
  rect 1.8x1.8 hole 0.8: 1(-2.5,0)
  round 1.8 hole 0.8: 2(2.5,0)
  silkscreen extent -5,-5 5,5, body extent -5,-5 5,5, height 20.05
DO214-AA [mm]
  rect 2.16x2.26 smd: 1(-2.45,0) 2(2.45,0)
  silkscreen extent -3,-2 4.1,2.1, body extent -2.65,-1.85 2.65,1.85, height 2.2
"DO214-AC (SMA)" [mm]
  rrect10% 2.1x1.8 smd: 1(-2.2,0) 2(2.2,0)
  silkscreen extent -2.72,-1.41 3.22,1.55, body extent -2.61,-1.3 2.61,1.3, height 2.4
FIDUCIAL [mm]
  round 1 smd: ""(0,0)
FUSE-2410 [mm]
  rrect10% 1.96x3.15 smd: 1(-2.45,0) 2(2.45,0)
  silkscreen extent -1.15,-1.5 1.15,1.5, body extent -3.05,-1.35 3.05,1.34, height 2.95
INDUTOR-6672 [mm]
  rect 2x3.5 smd: 1(-2.55,0) 2(2.55,0)
  silkscreen extent -3.5,-3.6 3.5,3.6, body extent -3.3,-3.6 3.3,3.6, height 3
LED-SMD-0603 [mm] "LED SMD 0603"
  rrect20% 0.8x0.9 smd: 1(-0.8,0) 2(0.8,0)
  Top Layer pour cut-out: -0.5,0.45 0.525,0.45 0.525,-0.45 -0.5,-0.45
  silkscreen extent -0.15,-0.35 -0.15,0.35, body extent -0.8,-0.4 0.8,0.4, height 0.34
LQFP-48 [mm]
  rrect50% 0.3x1.2 smd mask+0.05: 1(-2.5,-4.75) 2(-2,-4.75) 3(-1.5,-4.75) 4(-1,-4.75) 5(-0.5,-4.75) 6(0,-4.75) 7(0.5,-4.75) 8(1,-4.75) 9(1.5,-4.75) 10(2,-4.75) 11(2.5,-4.75) 12(3,-4.75) 25(3,3.75) 26(2.5,3.75) 27(2,3.75) 28(1.5,3.75) 29(1,3.75) 30(0.5,3.75) 31(0,3.75) 32(-0.5,3.75) 33(-1,3.75) 34(-1.5,3.75) 35(-2,3.75) 36(-2.5,3.75)
  rrect50% 1.2x0.3 smd mask+0.05: 13(4.5,-3.25) 14(4.5,-2.75) 15(4.5,-2.25) 16(4.5,-1.75) 17(4.5,-1.25) 18(4.5,-0.75) 19(4.5,-0.25) 20(4.5,0.25) 21(4.5,0.75) 22(4.5,1.25) 23(4.5,1.75) 24(4.5,2.25) 37(-4,2.25) 38(-4,1.75) 39(-4,1.25) 40(-4,0.75) 41(-4,0.25) 42(-4,-0.25) 43(-4,-0.75) 44(-4,-1.25) 45(-4,-1.75) 46(-4,-2.25) 47(-4,-2.75) 48(-4,-3.25)
  silkscreen extent -4.25,-5.5 3.25,2.5, body extent -4.25,-5 4.75,4, height 1.5
MCFPL-04 [mm]
  round 1.8 hole 1.1: 1(1.5,-1.5) 2(-1.5,-1.5) 3(1.5,1.5) 4(-1.5,1.5)
  silkscreen extent -5,-10.42 5,-2.54, body extent -5.07,-10.45 5.07,1.79, height 8.83
MCFPL-06 [mm]
  round 1.8 hole 1.1: 1(3,-1.5) 2(0,-1.5) 3(-3,-1.5) 4(3,1.5) 5(0,1.5) 6(-3,1.5)
  silkscreen extent -6.5,-10.42 6.5,-2.54, body extent -6.58,-10.45 6.58,1.79, height 8.83
MCFPL-08 [mm]
  round 1.8 hole 1.1: 1(4.5,-1.5) 2(1.5,-1.5) 3(-1.5,-1.5) 4(-4.5,-1.5) 5(4.5,1.5) 6(1.5,1.5) 7(-1.5,1.5) 8(-4.5,1.5)
  silkscreen extent -8,-10.42 8,-2.42, body extent -8.08,-10.45 8.08,1.79, height 8.83
MCFPL-10 [mm]
  round 1.8 hole 1.1: 1(6,-1.5) 2(3,-1.5) 3(0,-1.5) 4(-3,-1.5) 5(-6,-1.5) 6(6,1.5) 7(3,1.5) 8(0,1.5) 9(-3,1.5) 10(-6,1.5)
  silkscreen extent -9.5,-10.42 9.5,-2.42, body extent -9.57,-10.45 9.57,1.79, height 8.83
MCFPL-12 [mm]
  round 1.8 hole 1.1: 1(7.5,-1.5) 2(4.5,-1.5) 3(1.5,-1.5) 4(-1.5,-1.5) 5(-4.5,-1.5) 6(-7.5,-1.5) 7(7.5,1.5) 8(4.5,1.5) 9(1.5,1.5) 10(-1.5,1.5) 11(-4.5,1.5) 12(-7.5,1.5)
  silkscreen extent -11,-10.42 11,-2.42, body extent -11.07,-10.45 11.07,1.79, height 8.83
METALTEX-AX1 [mm]
  round 2.2 hole 1.3: 1(-6,5.186) 2(6,5.014)
  round 2.5 hole 1.3: 3(0,7.186) 4(-6,-7.014) 5(6,-7.186)
  silkscreen extent -7.5,-10.41 7.5,9, body extent -7.5,-10.4 7.5,8.4, height 15.2
MOV-0603 [mm]
  rrect10% 0.65x0.9 smd: 1(-0.775,0) 2(0.775,0)
  silkscreen extent -0.2,-0.5 0.2,0.5, body extent -0.8,-0.4 0.8,0.4, height 0.91
PEMC1-02 [mm]
  rect 1.8x1.8 hole 1.1: 1(-1.25,0)
  round 1.8 hole 1.1: 2(1.25,0)
  silkscreen extent -3.75,-2.3 3.75,3.45, body extent -3.7,-2.3 3.7,3.45, height 7
PEMC1-04 [mm]
  rect 1.8x1.8 hole 1.1: 1(-3.75,0)
  round 1.8 hole 1.1: 2(-1.25,0) 3(1.25,0) 4(3.75,0)
  silkscreen extent -6.25,-2.3 6.25,3.45, body extent -6.2,-2.38 6.2,3.37, height 7
PTC-0603 [mm]
  rrect10% 0.65x0.9 smd: 1(-0.775,0) 2(0.775,0)
  silkscreen extent -0.2,-0.5 0.2,0.5, body extent -0.83,-0.43 0.82,0.42, height 0.84
PTC-1206 [mm]
  rrect10% 1.1x1.7 smd: 1(-1.55,0) 2(1.55,0)
  silkscreen extent -0.63,-0.87 0.63,0.87, body extent -1.6,-0.79 1.6,0.79, height 0.75
RES-0603 [mm]
  rect 0.65x0.9 smd: 1(-0.775,0) 2(0.775,0)
  silkscreen extent -0.2,-0.5 0.2,0.5, body extent -0.8,-0.4 0.8,0.4, height 0.42
RES-0805 [mm]
  rect 1x1.3 smd: 1(-1,0) 2(1,0)
  silkscreen extent -0.25,-0.5 0.25,0.5, body extent -1,-0.63 1,0.63, height 0.43
RES-1206 [mm]
  rect 1.1x1.7 smd: 1(-1.55,0.025) 2(1.55,-0.025)
  silkscreen extent -0.63,-0.87 0.63,0.87, body extent -1.6,-0.83 1.6,0.83, height 0.53
RES-2512 [mm]
  rect 1.6x3.4 smd: 1(-3.2,0) 2(3.2,0)
  silkscreen extent -1.9,-1.7 1.9,1.7, body extent -3.17,-1.63 3.17,1.63, height 0.58
SMA [mm]
  rect 1.5x1.4 smd: 1(-1.75,0) 2(1.75,0)
  silkscreen extent -2.25,-1.35 2.8,1.8, body extent -2.49,-1.45 2.49,1.39, height 2.57
SOD123 [mm]
  rect 0.85x0.85 smd: 1(-1.675,0) 2(1.675,0)
  silkscreen extent -1.5,-0.9 2.1,1.1, body extent -1.85,-0.8 1.85,0.8, height 1.25
SOD-123FL [mm]
  rect 1.2x1.2 smd: 1(-1.6,0) 2(1.6,0)
  silkscreen extent -1.5,-0.9 2.1,1.1, body extent -1.85,-0.8 1.85,0.8, height 1.25
SOIC-08 [mm]
  rect 1.6x0.75 smd: 1(-2.7,1.905) 2(-2.7,0.635) 3(-2.7,-0.635) 4(-2.7,-1.905) 5(2.7,-1.905) 6(2.7,-0.635) 7(2.7,0.635) 8(2.7,1.905)
  silkscreen extent -2.8,-2.5 1.5,3, body extent -3,-2.45 3,2.45, height 1.56
SOIC-16-3D [mm]
  rect 0.7x1.8 smd paste+0 mask+0.075: 1(-4.445,-2.972) 2(-3.175,-2.972) 3(-1.905,-2.972) 4(-0.635,-2.972) 5(0.635,-2.972) 6(1.905,-2.972) 7(3.175,-2.972) 8(4.445,-2.972) 9(4.445,2.972) 10(3.175,2.972) 11(1.905,2.972) 12(0.635,2.972) 13(-0.635,2.972) 14(-1.905,2.972) 15(-3.175,2.972) 16(-4.445,2.972)
  silkscreen extent -4.95,-1.7 4.95,1.7, body extent -4.95,-3.1 4.95,3.1, height 1.7
SOT23-3 [mm]
  rect 0.6x0.7 smd: 1(-0.95,-1.05) 2(0.95,-1.05) 3(0,1.05)
  silkscreen extent -1.3,-0.35 1.3,0.25, body extent -1.5,-1.25 1.5,1.25, height 1.05
SOT23-6 [mm]
  rect 0.8x0.63 smd: 1(-1.2,0.95) 2(-1.2,0) 3(-1.2,-0.95) 4(1.2,-0.95) 5(1.2,0) 6(1.2,0.95)
  silkscreen extent -1.6,-1.6 1.2,2.1, body extent -1.4,-1.45 1.4,1.45, height 1.45
SOT223 [mm]
  rect 1x1.5 smd: 1(-2.3,0) 2(0,0) 3(2.3,0)
  rect 3.3x1.5 smd: 4(0,6.3)
  silkscreen extent -3,2 3,5, body extent -3.25,-0.2 3.25,6.8, height 1.68
SSOP-4 [mm]
  rect 1.5x0.6 smd: 1(-3.175,0.635) 2(-3.175,-0.635) 3(3.175,-0.635) 4(3.175,0.635)
  silkscreen extent -2.2,-1.37 2.2,1.35, body extent -3.5,-1.35 3.5,1.35, height 1.93
STLZ950/3G-5.08-V [mm]
  round 2.8 hole 1.6: 1(-5.08,0) 2(0,0) 3(5.08,0)
  silkscreen extent -8.24,-4.6 8.24,3.8
SW-SMD_8P-L6.7-W5.4-P1.27-LS8.5 [mm]
  rect 0.762x1.5 smd: 1(-1.905,-3.81) 2(-0.635,-3.81) 3(0.635,-3.81) 4(1.905,-3.81) 5(1.905,3.81) 6(0.635,3.81) 7(-0.635,3.81) 8(-1.905,3.81)
  silkscreen extent -3.33,-2.7 3.33,2.7, body extent -3.1,-4.06 3.1,4.06, height 2.35
TAXM8M4RDBCCT2T [mm]
  rect 1.4x1.2 smd: 1(-1.1,-0.85) 2(1.1,-0.85) 3(1.1,0.85) 4(-1.1,0.85)
  silkscreen extent -2.35,-1.95 2.1,1.7, body extent -1.6,-1.15 1.6,1.35, height 0.61
TO-252-2 [mm]
  rect 1.4x2.3 smd: 1(-2.3,0) 3(2.3,0)
  rect 5.7x6.2 smd: 4(0,6.45)
  silkscreen extent -3.5,-1 3.5,10, body extent -3.37,-0.76 3.37,9.34, height 2.37
TQFP-48_L7.0-W7.0-P0.50-LS9.0-BL-EP [mm]
  oval 0.28x1.6 smd paste-100 mask+0.051: 1(-2.75,-4.2) 2(-2.25,-4.2) 3(-1.75,-4.2) 4(-1.25,-4.2) 5(-0.75,-4.2) 6(-0.25,-4.2) 7(0.25,-4.2) 8(0.75,-4.2) 9(1.25,-4.2) 10(1.75,-4.2) 11(2.25,-4.2) 12(2.75,-4.2) 25(2.75,4.2) 26(2.25,4.2) 27(1.75,4.2) 28(1.25,4.2) 29(0.75,4.2) 30(0.25,4.2) 31(-0.25,4.2) 32(-0.75,4.2) 33(-1.25,4.2) 34(-1.75,4.2) 35(-2.25,4.2) 36(-2.75,4.2)
  oval 1.6x0.28 smd paste-100 mask+0.051: 13(4.2,-2.75) 14(4.2,-2.25) 15(4.2,-1.75) 16(4.2,-1.25) 17(4.2,-0.75) 18(4.2,-0.25) 19(4.2,0.25) 20(4.2,0.75) 21(4.2,1.25) 22(4.2,1.75) 23(4.2,2.25) 24(4.2,2.75) 37(-4.2,2.75) 38(-4.2,2.25) 39(-4.2,1.75) 40(-4.2,1.25) 41(-4.2,0.75) 42(-4.2,0.25) 43(-4.2,-0.25) 44(-4.2,-0.75) 45(-4.2,-1.25) 46(-4.2,-1.75) 47(-4.2,-2.25) 48(-4.2,-2.75)
  rect 5x5 smd paste-100 mask+0.051: 49(0,0)
  silkscreen extent -3.58,-4.2 3.58,3.58
TSSOP-14 [mm]
  rect 1.45x0.45 smd: 1(-2.95,1.95) 2(-2.95,1.3) 3(-2.95,0.65) 4(-2.95,0) 5(-2.95,-0.65) 6(-2.95,-1.3) 7(-2.95,-1.95) 8(2.95,-1.95) 9(2.95,-1.3) 10(2.95,-0.65) 11(2.95,0) 12(2.95,0.65) 13(2.95,1.3) 14(2.95,1.95)
  silkscreen extent -3.25,-2.5 1.75,3.25, body extent -3.2,-2.5 3.2,2.5, height 1.1

## Part data
C1 C16 C17 C46 C49: library part CAP-10uF/50V-0805-X5R-MLCC, "50V 10uF X5R ±10% 1206 Multilayer Ceramic Capacitors MLCC - SMD/SMT ROHS", LCSC=C13585
C2 C3 C4 C5 C6 C12 C15 C18 C22 C24 C28 C29 C31 C37 C40 C48 C52 C71: library part CAP-100nF/50V-0603-X7R-MLCC, "50V 100nF X7R ±10% 0603 Multilayer Ceramic Capacitors MLCC - SMD/SMT ROHS", LCSC=C14663
C7 C9: library part CAP-1uF/25V-0603-X7R-MLCC, "25V 1uF X7R ±10% 0603 Multilayer Ceramic Capacitors MLCC - SMD/SMT ROHS", LCSC=C29936
C8 C19 C55 C61 C64 C66 C68 C70: library part CAP-10nF/50V-0603-X7R-MLCC, "50V 10nF X7R ±10% 0603 Multilayer Ceramic Capacitors MLCC - SMD/SMT ROHS", LCSC=C1589
C10 C11: library part CAP-15pF/50V-0603-NP0-MLCC, "50V 15pF NP0 ±5% 0603 Ceramic Capacitors RoHS", LCSC=C107037
C13 C14 C30 C32 C33 C34 C35 C36 C54 C60 C63 C65 C67 C69: library part CAP-39pF/50V-0603-X7R-MLCC, "50V 39pF X7R ±10% 0603 Multilayer Ceramic Capacitors MLCC - SMD/SMT ROHS", LCSC=C107049
C20 C21 C23: library part CAP-10uF/16V-0603-X5R, "16V 10uF X5R ±20% 0603 Multilayer Ceramic Capacitors MLCC - SMD/SMT ROHS", LCSC=C92487
C25 C26 C27: library part CAP-10uF/25V-0805-X5R-MLCC, "25V 10uF X5R ±10% 0805 Ceramic Capacitors ROHS", LCSC=C15850
C38 C44 C45 C57 C58: library part CAP-220nF/50V-0603-X7R-MLCC, "50V 220nF X7R ±10% 0603 Multilayer Ceramic Capacitors MLCC - SMD/SMT ROHS", LCSC=C64705
C39: library part CAP-1000uF-35V-D10-H20, "1000uF 35V ±20% Through Hole,D10xL20mm Aluminum Electrolytic Capacitors RoHS", LCSC=C398835, VR=35V
C41 C50 C53: library part CAP-470nF/50V-0603-X7R-MLCC, "50V 470nF X7R ±10% 0603 Multilayer Ceramic Capacitors MLCC - SMD/SMT ROHS", LCSC=C513577
C42: library part CAP-22nF/100V-0805-X7R-MLCC, "100V 22nF X7R ±10% 0805 Ceramic Capacitors RoHS", LCSC=C107137
C43 C47 C56 C59: library part CAP-1nF/100V-0805-NP0-MLCC, "100V 1nF NP0 ±5% 0805 Ceramic Capacitors RoHS", LCSC=C326940
C51 C62: library part CAP-2.2nF/50V-0603-X7R-MLCC, "50V 2.2nF X7R ±10% 0603 Ceramic Capacitors RoHS", LCSC=C107082
D1 D2 D7 D8: "400W@8/20us Bidirectional SOT-23 ESD and Surge Protection (TVS/ESD) ROHS", LCSC=C22363671
D3: "24.6A 600W@8/20us 24.4V 19.2V Bidirectional 15V SMB(DO-214AA) ESD and Surge Protection (TVS/ESD) ROHS", LCSC=C2760879
D4 D26: "28.9V 26V 42.1V 14.2A 600W Bidirectional DO-214AA(SMB) TVS Diodes RoHS", LCSC=C908854
D5: library part DIODE-SCHOTTKY-60V-3A-MBRS360BT3G, "125A 60V 630mV@3A 3A SMB(DO-214AA) Single Diodes RoHS", LCSC=C59027
D6: "65.3A 600W 9.2V 6.4V Unidirectional 5V DO-214AA TVS Diodes RoHS", LCSC=C83333
D9 D11: "DIODO ZENER 15V-500mW-SOD123", LCSC=C266569
D10 D12: "28.9V 26V 9.5A 42.1V 400W Unidirectional DO-214AC(SMA) TVS Diodes RoHS", LCSC=C2848697
D13 D31 D33 D35 D37 D39 D41: "1A 4ns 75V Independent 1V@50mA 150mA SOD-123 Single Diodes RoHS", LCSC=C241939
D14 D15 D16 D17 D18 D19: "25A 1 Independent 40V 450mV@1A 1A SOD-123 Single Diodes RoHS", LCSC=C82544
D20 D21 D22 D23 D24 D25: "C20754788", LCSC=C20754788
D27 D28 D29 D30: library part DIODE-SCHOTTKY-60V-1A-DSK16, "Independent 60V 700mV@1A 1A SOD-123FL Single Diodes RoHS", LCSC=C48676
D32 D34 D36 D38 D40 D42: "30V Dual 200mA 800mV@100mA SOT-23 Schottky Barrier Diodes (SBD) ROHS", LCSC=C916425
F1: library part FUSE-125V-10A-2410, "125V Surface Mount Fuse 10A 2410 Fuses RoHS", LCSC=C136374
F2: library part FUSE-250V-5A-2410, "250V Surface Mount Fuse 5A 2410 Fuses RoHS", LCSC=C136387
FB1 FB2 FB3 FB4 FB5 FB6 FB7 FB8: "FERRITE BEAD 120Ω 0603 1LN", LCSC=C14709
J1: library part STLZ950/3G-5.08-V-GREEN, "CONECTOR PHOENIX MECANO 3 VIAS PASSO 5,08mm VERDE 180º"
J2: "4 24V 25mA SPST 3,000 Cycles Black Slide, Recessed SMD-8P,6.7x5.4mm DIP Switches/SIP Switches ROHS", LCSC=C319050
J3 J6: "CONECTOR-METALTEX-PASSO-3mm-90 GRAUS MONTAGEM PLACA-COMPATIVEL MICROFIT-8VIAS / 5A-250VCA"
J4: "CONECTOR-METALTEX-PASSO-3mm-90 GRAUS MONTAGEM PLACA-COMPATIVEL MICROFIT-4VIAS / 5A-250VCA"
J5: "CONECTOR-METALTEX-PASSO-3mm-90 GRAUS MONTAGEM PLACA-COMPATIVEL MICROFIT-12VIAS / 5A-250VCA"
J7: "CONECTOR-METALTEX-PASSO-3mm-90 GRAUS MONTAGEM PLACA-COMPATIVEL MICROFIT-6VIAS / 5A-250VCA"
J8: "CONECTOR-METALTEX-PASSO-3mm-90 GRAUS MONTAGEM PLACA-COMPATIVEL MICROFIT-10VIAS / 5A-250VCA"
J9 J10: "CONECTOR PASSO 2,5mm / 250VCA / 3A / 10mOHMS"
K1: "BARRA DE PINOS DUPLA 2,54mm 6 VIAS 180º"
K2: "RELÉ-METALTEX-BOBINA 12V-15A-SPDT"
L1 L2: library part D-LED-SMD-PKG@0603-RED, "25mA 120mcd 620nm~625nm Red 1.8V~2.4V 0603 LED Indication - Discrete RoHS", LCSC=C19171390, Part Number=YLED0603R, Wavelength="625nm (Red)"
L3: library part FIXED-INDUCTOR-SMD-22uH-7.2X6.6mm-2.6A-110mΩ, "2.6A 22uH ±20% 110mΩ SMD,7.2x6.6mm Fixed Inductors RoHS", LCSC=C5189963
MOV1 MOV2 MOV3 MOV4 MOV5 MOV6: library part MOV-RL0603A360K-SMD, "78V 28V 21V 33.6V~42V 0603 Varistors, MOVs RoHS", LCSC=C2935568
PTC1 PTC6 PTC7 PTC8 PTC9 PTC10 PTC11 PTC12 PTC13: library part PTC-FUSE-30V-500mA-1206, "30V 500mA 100A 1A 150mΩ 1206 PTC Resettable Fuses ROHS", LCSC=C720075
PTC2 PTC3 PTC4 PTC5 PTC14: library part PTC-FUSE-60V-10mA-0603, "60V 10mA 20A 50mA 15Ω 0603 PTC Resettable Fuses ROHS", LCSC=C914088
Q1: library part TRAN-MOSFET-N-CHAN-40V-130A-DPAK, "40V 130A 2.5mΩ@10V 125W TO-252 Single FETs, MOSFETs RoHS", LCSC=C41354884
Q2: library part TRANSISTOR-BC856B,215, "65V 220@2mA,5V 250mW 100mA PNP SOT-23 Bipolar (BJT) ROHS", LCSC=C109310
Q3 Q5 Q7 Q8: library part TRANSISTOR-BC846B,215-SOT23, "65V 200@10mA,5V 250mW 100mA NPN SOT-23 Bipolar (BJT) ROHS", LCSC=C87062
Q4 Q6: "P-Channel 40V 5A 1.4W Surface Mount SOT-23", LCSC=C5337197
Q9 Q10 Q11 Q12: "40V 40A 2.4V 2 N-Channel SOIC-8 Single FETs, MOSFETs RoHS", LCSC=C477943
R1 R2 R13 R14 R15 R21 R25 R26 R27 R28 R29 R37 R38 R42 R43 R44 R45 R47 R49 R51 R53 R55 R57: library part RES-10K-1%-100mW-0603, "100mW Thick Film Resistor 75V ±100ppm/℃ ±1% 10kΩ 0603 Chip Resistor - Surface Mount ROHS", LCSC=C98220
R3 R4 R5 R6 R11 R12 R58 R59 R76 R82 R90 R95 R99 R103 R106: library part RES-1K-1%-100mW-0603, "100mW Thick Film Resistor 75V ±100ppm/℃ ±1% 1kΩ 0603 Chip Resistor - Surface Mount ROHS", LCSC=C22548
R7 R62 R63 R70 R71 R78 R79 R80 R84 R85 R86 R93 R97 R101 R105: library part RES-10R-1%-100mW-0603, "100mW Thick Film Resistor 75V ±1% ±400ppm/℃ 10Ω 0603 Chip Resistor - Surface Mount ROHS", LCSC=C22859
R8 R61 R64: library part RES-0R-1%-100mW-0603, "100mW 0Ω 75V Thick Film Resistor ±5% 0603 Chip Resistor - Surface Mount RoHS", LCSC=C95177
R9 R10: library part RES-0R-1%-125mW-0805, "100mW Thick Film Resistor 75V ±100ppm/℃ ±1% 0R Chip Resistor - Surface Mount ROHS", LCSC=C17477
R16 R19 R36 R41 R46 R48 R50 R52 R54 R56: library part RES-2.2K-1%-125mW-0805, "125mW 2.2kΩ 150V ±100ppm/℃ Thick Film Resistor ±1% 0805 Chip Resistor - Surface Mount ROHS", LCSC=C2907234
R17 R18: library part RES-1K-1%-125mW-0805, "125mW Thick Film Resistor 150V ±100ppm/℃ ±1% 1kΩ 0805 Chip Resistor - Surface Mount ROHS", LCSC=C17513
R20: library part RES-0R-1%-250mW-1206, "0Ω 250mW 200V Thick Film Resistor ±1% 1206 Chip Resistor - Surface Mount RoHS", LCSC=C137394
R22: library part RES-49.9K-1%-100mW-0603, "100mW 49.9kΩ 75V ±100ppm/℃ Thick Film Resistor ±1% 0603 Chip Resistor - Surface Mount ROHS", LCSC=C114624
R23 R34 R39: library part RES-100K-1%-100mW-0603, "100mW Thick Film Resistor 75V ±100ppm/℃ ±1% 100kΩ 0603 Chip Resistor - Surface Mount ROHS", LCSC=C14675
R24: library part RES-9.53K-1%-100mW-0603, "100mW 9.53kΩ 75V ±100ppm/℃ Thick Film Resistor ±1% 0603 Chip Resistor - Surface Mount ROHS", LCSC=C2960722
R30 R32 R77 R83 R92 R96 R100 R104: library part RES-100R-1%-100mW-0603, "100mW Thick Film Resistor 75V ±100ppm/℃ ±1% 100Ω 0603 Chip Resistor - Surface Mount ROHS", LCSC=C105588
R31 R33: library part RES-120R-1%-500mW-1206, "120Ω ±1% 500mW 1206 Thick Film Resistor", LCSC=C5713417
R35 R40: library part RES-2K-1%-250mW-1206, "250mW Thick Film Resistor 200V ±100ppm/℃ ±5% 2kΩ 1206 Chip Resistor - Surface Mount ROHS", LCSC=C2907466
R60: library part RES-4.7R-1%-125mW-0805, "125mW 4.7Ω 150V ±200ppm/℃ Thick Film Resistor ±1% 0805 Chip Resistor - Surface Mount RoHS", LCSC=C137513
R65 R66 R67 R69: library part RES-1R-1%-100mW-0603, "1Ω 100mW 75V ±200ppm/℃ Thick Film Resistor ±5% 0603 Chip Resistor - Surface Mount RoHS", LCSC=C2907116
R68: library part RES-2.2R-1%-100mW-0603, "2.2Ω 100mW 75V ±200ppm/℃ Thick Film Resistor ±5% 0603 Chip Resistor - Surface Mount RoHS", LCSC=C2930032
R72 R74 R87 R91: library part RES-47R-1%-100mW-0603, "100mW Thick Film Resistor 75V ±100ppm/℃ ±1% 47Ω 0603 Chip Resistor - Surface Mount ROHS", LCSC=C114623
R73 R88: library part RES-75mΩ-1%-3W-2512, "3W 75mΩ Current Sense Resistor ±50ppm/℃ ±1% 2512 Current Sense Resistors RoHS", LCSC=C49164914
R75 R81 R89 R94 R98 R102: library part RES-10K-1%-125mW-0805, "100mW Thick Film Resistor 75V ±100ppm/℃ ±1% 10K Chip Resistor - Surface Mount ROHS", LCSC=C84376
U1: JLCPCB Part Class="Extended Part", LCSC=C529355, Manufacturer=ST(意法半导体), Voltage - Supply=1.71V~3.6V, ADC (Bit)=12bit, Add into BOM=yes, Applications=-, Convert to PCB=yes, CPU Core="ARM Cortex-M Series", CPU Maximum Speed=170MHz, DAC (Bit)=12bit, Datasheet=https://item.szlcsc.com/datasheet/STM32G431CBT6/549633.html, Device=STM32G431CBT6, Manufacturer Part=STM32G431CBT6, Number of I/O=38, Program Memory Type=FLASH, Program Storage Size=128KB, Supplier=LCSC, Supplier Footprint=LQFP-48(7x7), Supplier Part=C529355, Symbol=STM32G431CBT6
U2 U15: "80V 3.75kV 50mA 200mV@10mA,1mA 6V 1.2V DC SSOP-4-1.27mm Transistor, Photovoltaic Output Optoisolators ROHS", LCSC=C92243
U3 U9 U13 U14: "2V~6V 16ns@6V,50pF 2uA 6 1 TSSOP-14 Gates and Inverters RoHS", LCSC=C6810
U4: library part IC-OR-CONTROLLER-LM74700QDBVRQ1, "Low IQ Battery Reverse Protection Ideal Diode Controller", LCSC=C2941042
U5: "Step-down type Adjustable 800mV~36V 1.2A 4.5V~36V SOT-23-6 DC-DC Converters ROHS", LCSC=C111916
U6: LCSC=C126027
U7 U8: "Low-Power, Slew-Rate-Limited RS-485/RS-422 Transceivers", LCSC=C5279041
U10: "8 I2C SOP-16-150mil I/O Expanders RoHS"
U11: "50V 500mA SOIC-16 Bipolar Transistor Arrays RoHS", LCSC=C7512
U12: JLCPCB Part Class="Extended Part", LCSC=C516354, Manufacturer=TRINAMIC, Operating Temperature=-40℃~+125℃, Output Current=-, Add into BOM=yes, Convert to PCB=yes, Datasheet=https://item.szlcsc.com/datasheet/TMC5160A-TA-T/532372.html, Device=TMC5160A-TA-T, Interface=STEP/DIR；UART；SPI, Manufacturer Part=TMC5160A-TA-T, Step Resolution=256, Supplier=LCSC, Supplier Footprint=TQFP-48-EP(7x7), Supplier Part=C516354, Symbol=TMC5160A-TA-T, Technology=-, Voltage - Supply=-
X1: library part XTAL-8MHZ-3225-SMD, "Crystal Oscillator 12pF SMD3225-4P Crystals RoHS", LCSC=C7294546

## Free pads (board coordinates)
  round 0 hole 3.5 unplated: ""(5,5) ""(5,95) ""(100,5) ""(100,95)

## Via types
v1: diameter 0.45, hole 0.2, Top Layer to Bottom Layer, tented both sides, 591 vias
v2: diameter 0.6, hole 0.3, Top Layer to Bottom Layer, tented both sides, 173 vias

## Nets (pads, with @x,y where several pads share a name; then routed paths per layer and width w, separated by ;. In a path a pad name is that pad's centre, name@x,y a point inside that pad or via, vN(x,y) a via of type N, cw(c..) or ccw(c..) an arc to the next point about the centre after c; other vN are vias at no path point)
3,3V: C1.2 C2.2 C3.2 C4.2 C5.2 C7.2 C8.2 C12.2 C23.2 C24.2 C31.2 C37.2 C48.2 C52.2 C71.2 D2.1 D32.2 D34.2 D36.2 D38.2 D40.2 D42.2 K1.1 R1.2 R2.2 R7.1 R9.2 R11.2 R12.2 R13.2 R14.2 R17.2 R46.1 R48.1 R50.1 R52.1 R54.1 R56.1 R58.2 R59.2 R61.2 R75.2 R81.2 R89.2 R94.2 R98.2 R102.2 U1.1 U1.21 U1.24 U1.36 U1.48 U6.2 U6.4 U9.14 U10.16 U12.20 U12.22 U13.14 U14.14 | length 492.7
  Top Layer w0.25: R61.2@36.7,76.225 v1(36.7,77.05) ; U12.22@38.925,71.625 38.931,71.619 38.931,70.619 39.15,70.4 39.7,70.4 39.919,70.619 39.919,71.619 U12.20@39.925,71.625 39.925,73.225 39.625,73.525 C48.2@39.625,74.725 39.613,74.738 39.613,75.562 v1(39.6,75.575) ; R14.2@68.25,85.275 68.25,85.15 68.45,84.95 68.513,84.95 69.015,84.448 K1.1@69.015,82.32 K1.1@69.31,82.025 ; C2.2@71.1,55.85 71.275,55.85 71.9,56.475 U1.48@73.15,56.475 ; C1.2@71.125,54.425 C2.2@71.125,55.825 ; C2.2@71.125,56.05 C2.2@71.15,56.025 ; v1(73.575,66.575) C3.2@73.575,65.675 73.775,65.475 73.775,65.275 74.65,64.4 U1.36@74.65,63.475 ; C5.2@74.375,53 74.375,53.175 74.65,53.45 U1.1@74.65,54.975 ; U1.21@81.65,60.475 83.3,60.475 83.6,60.775 C8.2@83.775,60.775 C7.2@85.275,60.775 ; U1.24@81.65,61.975 U1.24@81.675,62 ; U1.24@81.65,62 U1.24@81.675,62 ; C4.2@83.775,62.15 83.625,62 U1.24@81.675,62 ; R58.2@89.4,38.125 89.4,38 89.6,37.8 90.375,37.025 90.375,37.022 90.747,36.65 92.378,36.65 92.7,36.972 92.7,36.975 93.725,38 R59.2@93.725,38.125 94.45,38.125 95.1,38.775 C37.2@95.1,40.2 ; U10.16@93.44,40.225 U10.16@93.465,40.2 ; R1.2@99.3,64.4 100.175,64.4 100.525,64.05 100.525,59.375 v2(100.475,59.325)
  Top Layer w0.3: v1(23.8,32.1) R17.2@24.95,32.1 ; R89.2@36.625,97.75 39.95,97.75 v1(40.775,96.925) ; R81.2@36.65,94.2 36.669,94.219 v1(38.994,94.219) ; R75.2@36.675,90.65 36.7,90.675 v1(39.025,90.675) ; v1(40.45,89.7) 43.25,89.7 43.338,89.613 43.362,89.613 D32.2@43.35,89.6 ; v1(40.55,93.175) D34.2@43.363,93.175 ; D34.2@43.35,93.15 D34.2@43.363,93.137 ; D36.2@43.35,96.725 43.363,96.712 43.988,96.712 v1(44,96.7) ; v2(48.125,93.325) 48.125,90.825 C52.2@48.15,90.8 49.8,90.8 U13.14@49.825,90.825 ; v1(55.6,91.875) R12.2@56.425,91.875 ; v2(56.175,35.6) C71.2@56.175,36.475 U14.14@56.175,38.2 ; D42.2@58.35,23.3 v2(58.35,22.25) 58.35,21.5 R102.2@58.45,21.4 ; R98.2@61.575,21.4 61.637,21.462 v2(61.637,22.25) D40.2@61.637,23.3 ; R11.2@62.025,91.875 v1(62.85,91.875) ; R94.2@64.725,21.4 64.925,21.6 D38.2@64.925,23.3 ; v2(67.375,21.15) 67.375,21.975 R46.1@67.4,22 ; v2(70,21.175) R56.1@70,22 ; v2(70.275,77.6) 70.288,77.587 70.288,76.738 R13.2@70.3,76.725 ; v2(71.05,33.8) C31.2@71.05,36.45 U9.14@71.05,38.025 ; v2(72.5,21.175) R54.1@72.5,22 ; v2(75,21.175) R52.1@75,22 ; v2(77.5,21.175) R50.1@77.5,22 ; v2(80,21.175) R48.1@80,22 ; U10.16@93.465,40.2 C37.2@95.1,40.2 95.275,40.375 95.45,40.375 96.2,41.125 v2(96.2,44.65) ; R2.2@99.25,59.325 v2(100.475,59.325)
  Top Layer w0.4: R9.2@67.45,89.675 v2(68.35,89.675) ; K1.1@69.31,82.025 D2.1@71.85,82.025 C12.2@71.85,83.6 v2(71.85,86.1)
  Bottom Layer w0.3: v1(23.8,32.1) 24.625,32.1 ; 25.45,31.275 ccw(c24.625,31.275) 24.625,32.1 ; 25.45,32.1 24.625,32.1 ; 25.45,33 25.45,32.925 cw(c24.625,32.925) 24.625,32.1 ; 36.7,75.625 v1(36.7,77.05) ; 38.438,74.387 39.6,75.55 v1(39.6,75.575) ; v1(38.994,94.219) 39,94.225 39.625,94.225 ; v1(39.025,90.675) 39.625,90.675 ; 39.625,89.625 39.7,89.7 v1(40.45,89.7) ; 39.625,93.287 39.737,93.175 v1(40.55,93.175) ; 40.338,94.938 40.338,95.062 40.775,95.5 v1(40.775,96.925) ; 43.975,95.65 43.975,96.675 v1(44,96.7) ; v2(48.125,93.325) 48.775,93.325 49.487,94.038 ; 55.475,34.9 ccw(c55.475,35.6) v2(56.175,35.6) ; v1(55.6,91.875) 55.6,93.075 ; 56.15,34.9 56.175,34.9 v2(56.175,35.6) ; 56.875,34.9 cw(c56.875,35.6) v2(56.175,35.6) ; 57.897,24.153 cw(c57.897,23.7) 58.35,23.7 ; v2(58.35,22.25) 58.35,23.7 ; 58.425,24.25 58.35,24.175 58.35,23.7 ; 59.425,24.153 58.803,24.153 ccw(c58.803,23.7) 58.35,23.7 ; 61.184,24.153 cw(c61.184,23.7) 61.637,23.7 ; v2(61.637,22.25) 61.637,23.7 ; 61.637,24.25 61.637,23.7 ; 62.562,24.153 62.091,24.153 ccw(c62.091,23.7) 61.637,23.7 ; v1(62.85,91.875) 62.85,92.85 ; v2(64.9,22.25) 64.95,22.25 65.507,22.807 ; 65.812,23.613 65.812,23.546 cw(c64.767,23.546) 65.507,22.807 ; 66.063,23.362 65.507,22.807 ; 66.35,23.075 66.155,23.075 ccw(c66.155,22.157) 65.507,22.807 ; 66.914,22.384 cw(c66.914,21.923) 67.375,21.923 ; v2(67.375,21.15) 67.375,21.923 ; 67.375,22.475 67.375,21.923 ; 67.836,22.384 ccw(c67.836,21.923) 67.375,21.923 ; 67.949,22.387 68.027,22.387 ; v2(70,21.175) 70.025,21.2 70.025,22.475 ; v2(70.275,77.6) 70.3,77.575 76.55,77.575 76.6,77.575 76.65,77.625 ; 70.3,33.05 ccw(c70.3,33.8) v2(71.05,33.8) ; 70.912,33.05 ccw(c70.912,33.188) 71.05,33.188 v2(71.05,33.8) ; 71.8,33.05 cw(c71.8,33.8) v2(71.05,33.8) ; v2(72.5,21.175) 72.525,21.2 72.525,22.475 ; v1(73.575,66.575) 74.525,65.625 77.7,65.625 79.137,67.062 79.137,67.113 ; v2(75,21.175) 75,22.475 ; v2(77.5,21.175) 77.5,22.475 ; 95.375,45.475 cw(c95.375,44.65) v2(96.2,44.65) ; 96.2,45.475 v2(96.2,44.65) ; 97.188,45.475 97.025,45.475 ccw(c97.025,44.65) v2(96.2,44.65)
  Bottom Layer w0.4: 54.05,54.325 71.911,54.325 72.136,54.55 v1(72.15,54.55) 72.164,54.55 72.214,54.6 v1(73.525,54.6) ; v2(68.35,89.675) 68.404,89.675 68.829,90.1 69.05,90.1 ; v2(71.85,86.1) 73.05,86.1 73.213,85.937
  Bottom Layer w0.5: 25.45,32.925 25.45,32.1 25.45,31.275 25.45,30.7 26.3,29.85 51.675,29.85 57.275,24.25 58.425,24.25 61.637,24.25 65.175,24.25 65.812,23.613 66.063,23.362 66.35,23.075 66.95,22.475 67.375,22.475 70.025,22.475 72.525,22.475 75,22.475 77.5,22.475 78.7,22.475 v2(80,21.175) ; 25.45,33 26.525,34.075 41.275,34.075 43.263,36.063 43.975,36.775 ; v2(42.5,47.125) 42.5,38.25 43.587,37.163 ; v2(44.225,49.7) 50.75,49.7 54.05,53 54.05,54.325 54.05,68.05 50.45,71.65 41.175,71.65 38.438,74.387 37.2,75.625 36.7,75.625 34.05,75.625 32.75,76.925 32.75,82.075 39.625,88.95 39.625,89.625 39.625,90.675 39.625,93.287 39.625,94.225 40.338,94.938 41.05,95.65 43.975,95.65 47.875,95.65 49.487,94.038 50.45,93.075 55.6,93.075 66.075,93.075 69.05,90.1 73.213,85.937 76.55,82.6 76.55,77.575 76.55,69.7 79.137,67.113 81.325,64.925 83.575,64.925 v2(85.875,62.625) ; 56.15,34.9 55.475,34.9 45.85,34.9 44.363,36.387 ; 56.175,34.9 56.875,34.9 63.125,34.9 64.975,33.05 70.3,33.05 70.912,33.05 71.8,33.05 76.85,33.05 89.275,45.475 95.375,45.475 96.2,45.475 97.025,45.475 ; 97.188,45.475 98.175,45.475 100.475,47.775 v2@100.475,59.35 ; 43.587,37.163 43.975,36.775 ; 43.587,37.163 43.587,36.846 cw(c42.48,36.846) 43.264,36.064 cw(c44.047,35.278) 44.047,36.387 44.363,36.387 ; 43.975,36.775 44.363,36.387
  Bottom Layer w0.7: v2@43.075,49.7 v2(44.225,49.7) ; v2@44.6,47.125 cw(c44.6,47.1) v2(44.625,47.1)
  Bottom Layer w0.8: v2(42.5,47.125) v2@44.6,47.125
  other v1: 72.85,54.55
  other v2: 43.525,47.1 43.075,49.675